# EAGLE board M_3x4._v9 (EAGLE 9.6.2), part 1 of 2
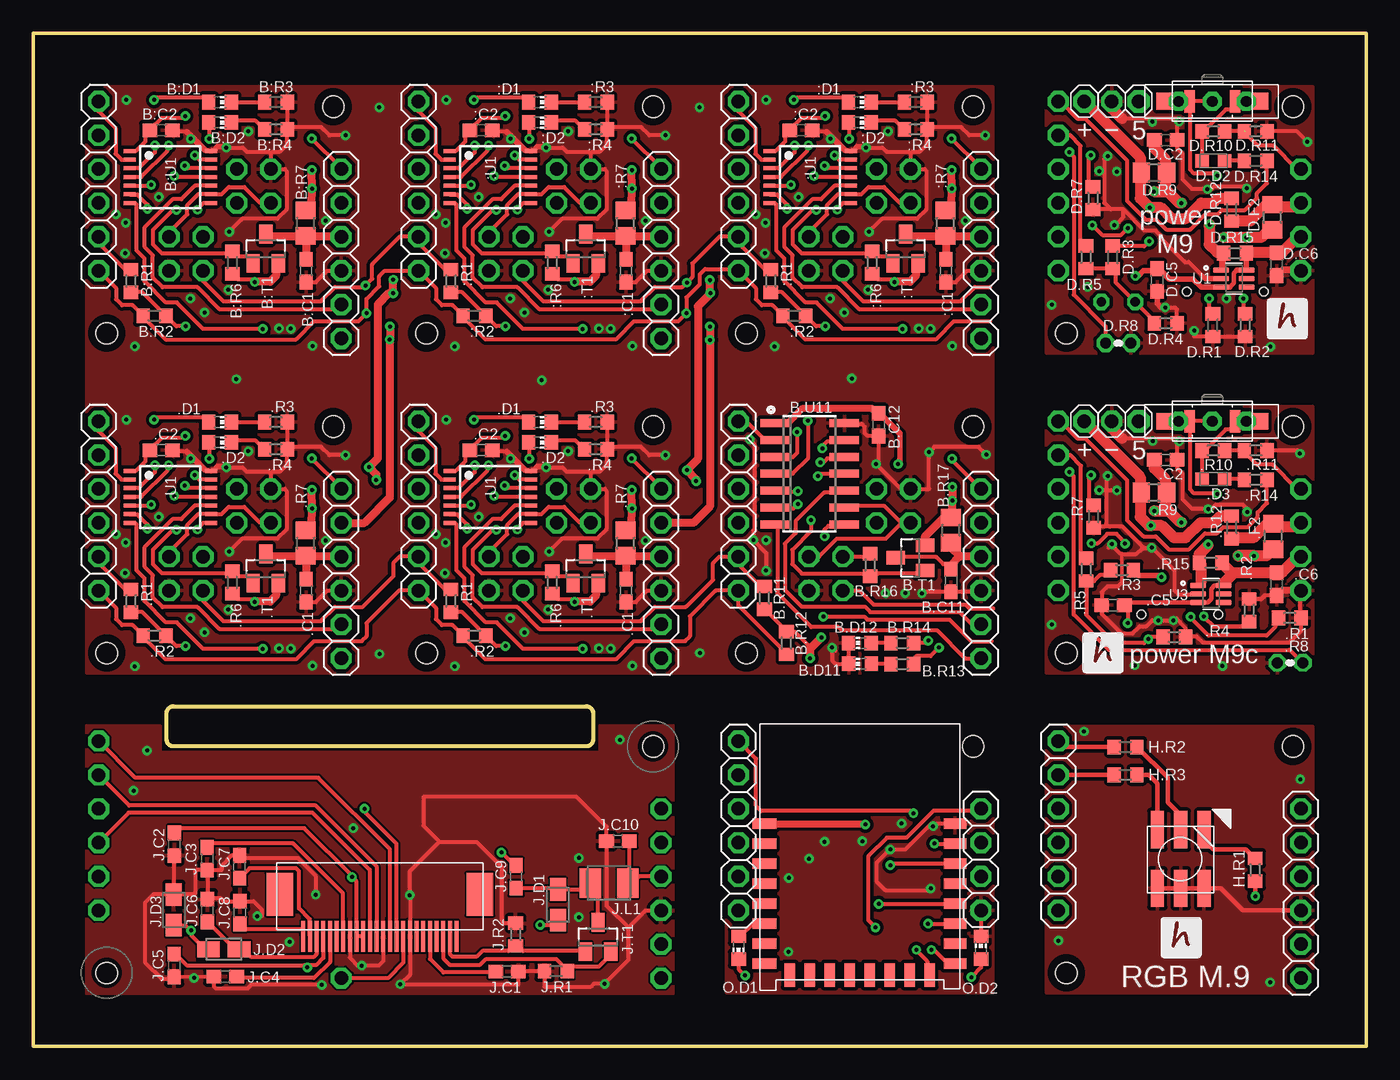
[diagram p0: board, top side]
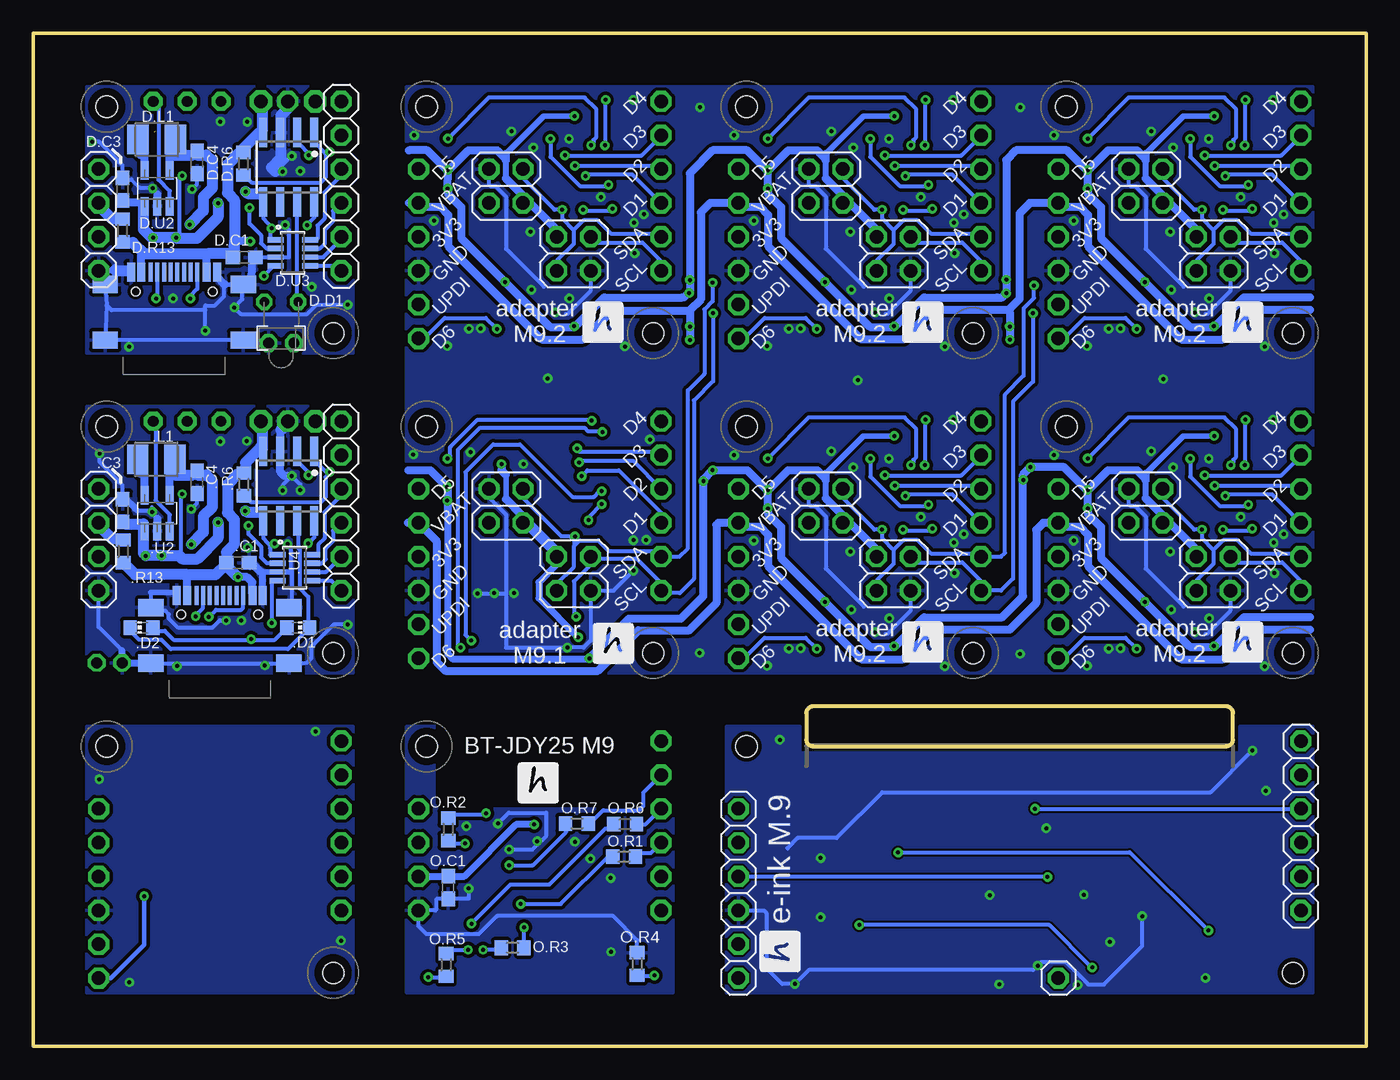
[diagram p1: board, bottom side, seen from below]

Size 100 x 76 mm. Coordinates in mm from the lower left corner, seen from the top.
Outline: 0,0 100,0 100,76 0,76 0,0
Copper layers (1*16): Top 0.035mm / dielectric 1.5mm / Bottom 0.035mm
Design rules "default *": minimum track width 10mil, minimum drill 0.3mm, track to track 6mil, track to pad 6mil, pad to pad 6mil, via to via 6mil, smd to smd 6mil, copper to edge 0mil, drill to drill 15mil, minimum pad ring 10mil, minimum via ring 8mil, stop-mask expansion 4mil, vias tented up to drill 14mil, thermal gap 10mil
Holes 1.6 mm at 5.5,29.5 22.5,46.5 29.5,29.5 46.5,46.5 53.5,29.5 70.5,46.5 5.5,53.5 22.5,70.5 29.5,53.5 46.5,70.5 53.5,53.5 70.5,70.5 5.5,5.5 46.5,22.5 70.5,22.5 77.5,5.5 94.5,22.5 77.5,29.5 94.5,46.5 77.5,53.5 94.5,70.5
tRestrict: area 21.5,45.5 to 23.5,47.5; area 4.5,28.5 to 6.5,30.5; area 45.5,45.5 to 47.5,47.5; area 28.5,28.5 to 30.5,30.5; area 69.5,69.5 to 71.5,71.5; area 52.5,52.5 to 54.5,54.5; area 21.5,69.5 to 23.5,71.5; area 4.5,52.5 to 6.5,54.5; area 45.5,69.5 to 47.5,71.5; area 28.5,52.5 to 30.5,54.5; area 69.5,45.5 to 71.5,47.5; area 52.5,28.5 to 54.5,30.5; 9 more areas
bRestrict: area 21.5,45.5 to 23.5,47.5; area 4.5,28.5 to 6.5,30.5; area 45.5,45.5 to 47.5,47.5; area 28.5,28.5 to 30.5,30.5; area 69.5,69.5 to 71.5,71.5; area 52.5,52.5 to 54.5,54.5; area 21.5,69.5 to 23.5,71.5; area 4.5,52.5 to 6.5,54.5; area 45.5,69.5 to 47.5,71.5; area 28.5,52.5 to 30.5,54.5; area 69.5,45.5 to 71.5,47.5; area 52.5,28.5 to 54.5,30.5; 9 more areas
Milling: 8 lines

## Footprints (pad centres in the part's own frame; a part is rotated, then mirrored left to right if it is on the bottom)
C0603 = smd 1.1 x 1: 1 -0.85,0; 2 0.85,0
CHIP-LED0603 = smd 1.1 x 1: A1 0,-0.85; C1 0,0.85
1X06 = drill 1.016 pad 1.575 octagon: 1 -6.35,0; 2 -3.81,0; 3 -1.27,0; 4 1.27,0; 5 3.81,0; 6 6.35,0
2X02 = drill 1.016 pad 1.575 octagon: 1 -1.27,-1.27; 2 -1.27,1.27; 3 1.27,-1.27; 4 1.27,1.27
R0603 = smd 1 x 1.1: 1 -0.85,0; 2 0.85,0
FUSE = smd 1.3 x 1.5: 1 -0.95,0; 2 0.95,0
SO23 = smd 1 x 1.4: D 0,1.1; G -0.95,-1.1; S 0.95,-1.1
SO14 = smd 0.6 x 2.2: 1 -3.81,-2.6; 2 -2.54,-2.6; 3 -1.27,-2.6; 4 0,-2.6; 5 1.27,-2.6; 6 2.54,-2.6; 7 3.81,-2.6; 8 3.81,2.6; 9 2.54,2.6; 10 1.27,2.6; 11 0,2.6; 12 -1.27,2.6; 13 -2.54,2.6; 14 -3.81,2.6
TSSOP14 = smd 0.3 x 0.9: 1 -1.95,-3.06; 2 -1.3,-3.06; 3 -0.65,-3.06; 4 0,-3.06; 5 0.65,-3.06; 6 1.3,-3.06; 7 1.95,-3.06; 8 1.95,3.06; 9 1.3,3.06; 10 0.65,3.06; 11 0,3.06; 12 -0.65,3.06; 13 -1.3,3.06; 14 -1.95,3.06
LED_1.8 = drill 0.7 octagon: 1 -1.27,-0.4; 2 1.27,-0.4
DIODE = smd 1 x 1: A 0.85,0; C -0.85,0
R0805 = smd 1.3 x 1.5: 1 -0.95,0; 2 0.95,0
1X04 = drill 1.016 pad 1.575 octagon: 1 -3.81,0; 2 -1.27,0; 3 1.27,0; 4 3.81,0
L3230M = smd 1.6 x 2.2: 1 -1.4,0; 2 1.4,0
1X-03-2 = drill 1.016 pad 1.676 octagon: 1 -2.016,0; 3 2.048,0 | drill 1.016 pad 1.575 octagon: 2 -0.016,0
SWITCH = drill 0.8 pad 1.422 octagon: P$1 2.54,0; P$2 0,0; P$3 -2.54,0 | smd 0.8 x 1.7: P$4 -1.7,0; P$5 1.7,0 | smd 1.27 x 1.27: P$6 -3.556,0; P$7 3.556,0
THERM = drill 0.813 octagon: 1 -0.953,0; 2 0.953,0
SOP8 = smd 0.6 x 2.2: 1 -1.905,-2.6; 2 -0.635,-2.6; 3 0.635,-2.6; 4 1.905,-2.6; 5 1.905,2.6; 6 0.635,2.6; 7 -0.635,2.6; 8 -1.905,2.6
SOT32-5 = smd 0.6 x 1.4: BP 0.95,1.35; GND 0,-1.35; SHDN 0.95,-1.35; VIN -0.95,-1.35; VOUT -0.95,1.35
SOT23-8 = smd 0.4 x 1.2: 1 -0.975,-1.3; 2 -0.325,-1.3; 3 0.325,-1.3; 4 0.975,-1.3; 5 0.975,1.3; 6 0.325,1.3; 7 -0.325,1.3; 8 -0.975,1.3
RGB_WW-FCE50TC-Q1 = smd 1 x 2.8: 1 -1.778,-2.286; 2 -0.028,-2.286; 3 1.722,-2.286; 4 -1.778,2.114; 5 -0.028,2.114; 6 1.722,2.114
SHOTKY_2.8 = smd 1.7 x 1.2: A -1.15,0; K 1.15,0
1X01 = drill 1.016 pad 1.575 octagon: 1 0,0
E-INK-24 = smd 0.3 x 2.3: P$1 -5.75,3.25; P$2 -5.25,3.25; P$3 -4.75,3.25; P$4 -4.25,3.25; P$5 -3.75,3.25; P$6 -3.25,3.25; P$7 -2.75,3.25; P$8 -2.25,3.25; P$9 -1.75,3.25; P$10 -1.25,3.25; P$11 -0.75,3.25; P$12 -0.25,3.25; P$13 0.25,3.25; P$14 0.75,3.25; P$15 1.25,3.25; P$16 1.75,3.25; P$17 2.25,3.25; P$18 2.75,3.25; P$19 3.25,3.25; P$20 3.75,3.25; P$21 4.25,3.25; P$22 4.75,3.25; P$23 5.25,3.25; P$24 5.75,3.25 | smd 2 x 3.2: P$25 -7.5,0.1; P$26 7.5,0.1
SOT65P210X110-6N = smd 1.19 x 0.4: 1 -0.96,0.65; 2 -0.96,0; 3 -0.96,-0.65; 4 0.96,-0.65; 5 0.96,0; 6 0.96,0.65
USB-C = smd 0.6 x 1.45: A1B12 -3.235,3.825; A4B9 -2.46,3.825; B1A12 3.215,3.825; B4A9 2.44,3.825 | smd 0.3 x 1.45: A5 -1.26,3.825; A6 -0.26,3.825; A7 0.24,3.825; A8 1.24,3.825; B5 1.74,3.825; B6 0.74,3.825; B7 -0.76,3.825; B8 -1.76,3.825 | smd 1.9 x 1.3: SH1 -5.18,2.91; SH2 -5.18,-1.27; SH3 5.18,-1.27; SH4 5.18,2.91 | hole 0.65: 2.88,2.38; -2.9,2.38
JDY-25 = smd 1.676 x 0.813: ALED 14.651,2; GND 14.651,12.5; OUT3 14.651,3.5; OUT4 14.651,8; PWRC 14.651,9.5; RST 14.651,11; RXD 14.651,6.5; TXD 14.651,5 | smd 1.778 x 0.813: INPUT1 0.349,2; INPUT3 0.349,3.5; INPUT5 0.349,6.5; NC1 0.349,11; NC2 0.349,9.5; NC3 0.349,8; STAT 0.349,5; VCC 0.349,12.5 | smd 0.813 x 1.778: INPUT2 3.75,1.149; INPUT4 6.75,1.149; NC4 2.25,1.149; NC5 9.75,1.149; NC6 11.25,1.149; OUT1 12.75,1.149; OUT2 5.25,1.149; OUT5 8.25,1.149

## Placement (x,y rotation side)
B.C11  100n  [C0603]  68.85,34.94 270 top
B.C12  100n  [C0603]  63.41,46.63 270 top
B.D11  RED  [CHIP-LED0603]  62.03,28.69 90 top
B.D12  GREEN  [CHIP-LED0603]  62,30.24 90 top
B.J1  [1X06]  28.9,40.54 90 top
B.J2  [1X06]  4.9,40.54 90 top
B.J3  [2X02]  11.46,35.46 270 bottom
B.J4  [2X02]  16.54,40.54 270 bottom
B.J5  [1X06]  23.1,35.46 270 top
B.J6  [2X02]  35.46,35.46 270 bottom
B.J7  [2X02]  40.54,40.54 270 bottom
B.J8  [1X06]  47.1,35.46 270 top
B.J9  [1X06]  52.9,64.54 90 top
B.J10  [2X02]  59.46,59.46 270 bottom
B.J11  [2X02]  64.54,64.54 270 bottom
B.J12  [1X06]  71.1,59.46 270 top
B.J13  [1X06]  4.9,64.54 90 top
B.J14  [2X02]  11.46,59.46 270 bottom
B.J15  [2X02]  16.54,64.54 270 bottom
B.J16  [1X06]  23.1,59.46 270 top
B.J17  [1X06]  28.9,64.54 90 top
B.J18  [2X02]  35.46,59.46 270 bottom
B.J19  [2X02]  40.54,64.54 270 bottom
B.J20  [1X06]  47.1,59.46 270 top
B.J21  [1X06]  52.9,40.54 90 top
B.J22  [2X02]  59.46,35.46 270 bottom
B.J23  [2X02]  64.54,40.54 270 bottom
B.J24  [1X06]  71.1,35.46 270 top
B.R11  2k2  [R0603]  54.85,33.65 270 top
B.R12  2k2  [R0603]  56.5,30.24 90 top
B.R13  330  [R0603]  65.2,28.66 0 top
B.R14  2k2  [R0603]  65.19,30.24 0 top
B.R16  100k  [R0603]  62.78,36.11 90 top
B.R17  alt fuse or 0R  [FUSE]  68.85,38.72 90 top
B.T1  FDV304  [SO23]  65.8,36.64 90 top
B.U11  AT414  [SO14]  58.24,42.95 270 top
B:C1  100n  [C0603]  20.47,58.18 270 top
B:C2  100n  [C0603]  9.6,68.72 0 top
B:D1  RED  [CHIP-LED0603]  14,70.83 270 top
B:D2  GREEN  [CHIP-LED0603]  14,69.31 270 top
B:R1  2k2  [R0603]  7.34,57.42 270 top
B:R2  2k2  [R0603]  9.09,54.8 0 top
B:R3  330  [R0603]  18.2,70.83 180 top
B:R4  2k2  [R0603]  18.2,68.8 180 top
B:R6  100k  [R0603]  14.93,58.79 270 top
B:R7  alt fuse or 0R  [FUSE]  20.44,61.75 90 top
B:T1  FDV304  [SO23]  17.44,59.83 0 top
B:U1  ATTINY3224-XU  [TSSOP14]  10.28,65.22 270 top
D.C1  4u7  [C0603]  84.18,59.18 180 bottom
D.C2  4u7  [C0603]  84.95,67.99 180 top
D.C3  4u7  [C0603]  93.31,64.3 270 bottom
D.C4  10u  [C0603]  87.71,66.32 90 bottom
D.C5  100n  [C0603]  84.31,57.49 90 top
D.C6  100n  [C0603]  93.28,58.66 90 top
D.D1  LED_1.8  [LED_1.8]  81.4,55.45 180 bottom
D.D2  DIODE  [DIODE]  88.53,66.44 0 top
D.F2  1.1A  [R0805]  92.97,62.2 90 top
D.J2  [1X06]  76.9,64.54 90 bottom
D.J3  [1X04]  95.1,62 270 bottom
D.L1  2u2  [L3230M]  90.74,68.04 0 bottom
D.LIPOL  PINHEAD-1X3-2  [1X-03-2]  80.9,70.89 180 top
D.ON/OFF/RESET  SWITCH  [SWITCH]  88.46,70.89 0 top
D.R1  5k1  [R0603]  88.49,54.1 270 top
D.R2  5k1  [R0603]  90.92,54.1 270 top
D.R3  3k3  [R0603]  80.98,59.19 90 top
D.R4  5k1  [R0603]  84.95,54.24 180 top
D.R5  10k  [R0603]  78.97,59.2 90 top
D.R6  10k  [R0603]  84.24,66.21 90 bottom
D.R7  I=1800/R  [R0603]  79.5,63.62 90 top
D.R8  TERM_10K  [THERM]  81.4,52.75 180 top
D.R9  0.1R  [R0805]  84.08,65.53 180 top
D.R10  150k  [R0603]  88.53,68.64 0 top
D.R11  330k  [R0603]  91.71,68.64 0 top
D.R12  0  [R0603]  89.9,62.75 270 top
D.R13  0  [R0603]  93.31,61.2 90 bottom
D.R14  680k  [R0603]  91.71,66.44 180 top
D.R15  0R  [R0603]  90.16,59.5 180 top
D.U1  CN3083  [SOP8]  80.83,65.95 180 bottom
D.U2  LM3671_3.3  [SOT32-5]  90.7,64.37 0 bottom
D.U3  [SOT23-8]  80.53,59.53 270 bottom
G.J1  [1X06]  52.9,16.54 90 top
G.J2  [1X04]  71.1,14 270 top
H.D1  RGB_WW-FCE50TC-Q1  [RGB_WW-FCE50TC-Q1]  86.05,13.95 180 top
H.J1  [1X06]  95.1,11.46 270 top
H.J2  [1X06]  76.9,16.54 90 top
H.R1  82  [R0603]  91.67,13.24 90 top
H.R2  82  [R0603]  81.94,22.45 0 top
H.R3  82  [R0603]  81.94,20.36 0 top
J.C1  4u7  [C0603]  35.54,5.61 0 top
J.C2  1u  [C0603]  10.59,15.16 270 top
J.C3  1u  [C0603]  13.05,14.07 270 top
J.C4  4u7  [C0603]  14.4,5.23 180 top
J.C5  4u7  [C0603]  10.57,6.05 270 top
J.C6  4u7  [C0603]  13.07,10.19 90 top
J.C7  4u7  [C0603]  15.48,13.46 90 top
J.C8  1u  [C0603]  15.51,10.03 90 top
J.C9  4u7  [C0603]  36.22,12.72 90 top
J.C10  4u7  [C0603]  43.86,15.39 180 top
J.D1  SHOTKY_2.8  [SHOTKY_2.8]  39.36,10.62 270 top
J.D2  SHOTKY_2.8  [SHOTKY_2.8]  14.3,7.28 180 top
J.D3  SHOTKY_2.8  [SHOTKY_2.8]  10.54,10.23 90 top
J.J1  [1X06]  4.9,16.54 90 bottom
J.J2  [1X01]  23.1,5.11 0 bottom
J.J3  [1X06]  47.1,11.46 270 bottom
J.J4  E-INK-24  [E-INK-24]  26,11.5 180 top
J.L1  10uH/1A  [L3230M]  43.2,12.25 180 top
J.R1  82  [R0603]  39.21,5.64 180 top
J.R2  100k  [R0603]  36.19,8.38 270 top
J.T1  NX3008  [SO23]  42.37,8.19 0 top
O.C1  100n  [C0603]  68.87,11.91 90 bottom
O.D1  [CHIP-LED0603]  52.92,7.4 180 top
O.D2  [CHIP-LED0603]  71.1,7.4 0 top
O.R1  2k2  [R0603]  55.67,14.22 0 bottom
O.R2  2k2  [R0603]  68.87,16.27 270 bottom
O.R3  2k2  [R0603]  64.05,7.39 0 bottom
O.R4  2k2  [R0603]  54.7,6.17 270 bottom
O.R5  2k2  [R0603]  69.03,6.09 90 bottom
O.R6  2k2  [R0603]  55.6,16.66 0 bottom
O.R7  2k2  [R0603]  59.22,16.71 0 bottom
U1  LM66100DCKR  [SOT65P210X110-6N]  90.08,57.6 0 top
U$1  USB-C  [USB-C]  89.43,54.25 0 bottom
U$2  JDY-25  [JDY-25]  54.5,4.2 0 top
Ḃ.C1  100n  [C0603]  20.47,34.18 270 top
Ḃ.C2  100n  [C0603]  9.6,44.72 0 top
Ḃ.D1  RED  [CHIP-LED0603]  14,46.83 270 top
Ḃ.D2  GREEN  [CHIP-LED0603]  14,45.31 270 top
Ḃ.R1  2k2  [R0603]  7.34,33.42 270 top
Ḃ.R2  2k2  [R0603]  9.09,30.8 0 top
Ḃ.R3  330  [R0603]  18.2,46.83 180 top
Ḃ.R4  2k2  [R0603]  18.2,44.8 180 top
Ḃ.R6  100k  [R0603]  14.93,34.79 270 top
Ḃ.R7  alt fuse or 0R  [FUSE]  20.44,37.75 90 top
Ḃ.T1  FDV304  [SO23]  17.44,35.83 0 top
Ḃ.U1  ATTINY3224-XU  [TSSOP14]  10.28,41.22 270 top
Ḅ.C1  100n  [C0603]  44.47,34.18 270 top
Ḅ.C2  100n  [C0603]  33.6,44.72 0 top
Ḅ.D1  RED  [CHIP-LED0603]  38,46.83 270 top
Ḅ.D2  GREEN  [CHIP-LED0603]  38,45.31 270 top
Ḅ.R1  2k2  [R0603]  31.34,33.42 270 top
Ḅ.R2  2k2  [R0603]  33.09,30.8 0 top
Ḅ.R3  330  [R0603]  42.2,46.83 180 top
Ḅ.R4  2k2  [R0603]  42.2,44.8 180 top
Ḅ.R6  100k  [R0603]  38.93,34.79 270 top
Ḅ.R7  alt fuse or 0R  [FUSE]  44.44,37.75 90 top
Ḅ.T1  FDV304  [SO23]  41.44,35.83 0 top
Ḅ.U1  ATTINY3224-XU  [TSSOP14]  34.28,41.22 270 top
Ḅ:C1  100n  [C0603]  44.47,58.18 270 top
Ḅ:C2  100n  [C0603]  33.6,68.72 0 top
Ḅ:D1  RED  [CHIP-LED0603]  38,70.83 270 top
Ḅ:D2  GREEN  [CHIP-LED0603]  38,69.31 270 top
Ḅ:R1  2k2  [R0603]  31.34,57.42 270 top
Ḅ:R2  2k2  [R0603]  33.09,54.8 0 top
Ḅ:R3  330  [R0603]  42.2,70.83 180 top
Ḅ:R4  2k2  [R0603]  42.2,68.8 180 top
Ḅ:R6  100k  [R0603]  38.93,58.79 270 top
Ḅ:R7  alt fuse or 0R  [FUSE]  44.44,61.75 90 top
Ḅ:T1  FDV304  [SO23]  41.44,59.83 0 top
Ḅ:U1  ATTINY3224-XU  [TSSOP14]  34.28,65.22 270 top
Ḇ:C1  100n  [C0603]  68.47,58.18 270 top
Ḇ:C2  100n  [C0603]  57.6,68.72 0 top
Ḇ:D1  RED  [CHIP-LED0603]  62,70.83 270 top
Ḇ:D2  GREEN  [CHIP-LED0603]  62,69.31 270 top
Ḇ:R1  2k2  [R0603]  55.34,57.42 270 top
Ḇ:R2  2k2  [R0603]  57.09,54.8 0 top
Ḇ:R3  330  [R0603]  66.2,70.83 180 top
Ḇ:R4  2k2  [R0603]  66.2,68.8 180 top
Ḇ:R6  100k  [R0603]  62.93,58.79 270 top
Ḇ:R7  alt fuse or 0R  [FUSE]  68.44,61.75 90 top
Ḇ:T1  FDV304  [SO23]  65.44,59.83 0 top
Ḇ:U1  ATTINY3224-XU  [TSSOP14]  58.28,65.22 270 top
Ḋ.BTN  SWITCH  [SWITCH]  88.46,46.89 0 top
Ḋ.C1  4u7  [C0603]  84.66,36.27 180 bottom
Ḋ.C2  4u7  [C0603]  84.95,43.99 180 top
Ḋ.C3  4u7  [C0603]  93.31,40.2 270 bottom
Ḋ.C4  10u  [C0603]  87.71,42.32 90 bottom
Ḋ.C5  100n  [C0603]  81.01,33.09 0 top
Ḋ.C6  100n  [C0603]  93.28,34.66 90 top
Ḋ.D1  [CHIP-LED0603]  80.12,31.41 270 bottom
Ḋ.D2  [CHIP-LED0603]  91.88,31.41 90 bottom
Ḋ.D3  DIODE  [DIODE]  88.53,42.56 0 top
Ḋ.F2  1.1A  [R0805]  93.02,38.25 90 top
Ḋ.J1  USB-C  [USB-C]  86,30 0 bottom
Ḋ.J2  [1X06]  76.9,40.54 90 bottom
Ḋ.J3  [1X04]  95.1,38 270 bottom
Ḋ.L1  2u2  [L3230M]  90.77,44.04 0 bottom
Ḋ.LIPOL  PINHEAD-1X3-2  [1X-03-2]  80.9,46.89 180 top
Ḋ.R1  5k1  [R0603]  94.27,32.13 0 top
Ḋ.R2  5k1  [R0603]  91.22,32.71 90 top
Ḋ.R3  3k3  [R0603]  81.68,35.72 0 top
Ḋ.R4  5k1  [R0603]  85.61,30.7 180 top
Ḋ.R5  10k  [R0603]  79,35.76 90 top
Ḋ.R6  10k  [R0603]  84.21,42.16 90 bottom
Ḋ.R7  I=1800/R  [R0603]  79.55,39.75 90 top
Ḋ.R8  TERM_10K  [THERM]  94.29,28.76 0 top
Ḋ.R9  0.1R  [R0805]  84.08,41.53 180 top
Ḋ.R10  100k  [R0603]  88.53,44.7 0 top
Ḋ.R11  100k  [R0603]  91.71,44.7 0 top
Ḋ.R12  0  [R0603]  89.9,38.93 270 top
Ḋ.R13  0  [R0603]  93.25,37.13 90 bottom
Ḋ.R14  10k  [R0603]  91.71,42.51 180 top
Ḋ.R15  0R  [R0603]  88.33,36.26 180 top
Ḋ.U1  CN3083  [SOP8]  80.83,42.03 180 bottom
Ḋ.U2  LM3671_3.3  [SOT32-5]  90.7,39.99 0 bottom
Ḋ.U3  LM66100DCKR  [SOT65P210X110-6N]  88.35,33.93 0 top
Ḋ.U4  [SOT23-8]  80.38,35.91 270 bottom

## Library data of the parts
B.C11 B.C12 B:C1 B:C2 D.C1-D.C6 J.C1-J.C10 O.C1 Ḃ.C1 Ḃ.C2 Ḅ.C1 Ḅ.C2 Ḅ:C1 Ḅ:C2 Ḇ:C1 Ḇ:C2 Ḋ.C1-Ḋ.C6 = rcl; SPICEPREFIX: C
B.D11 B.D12 B:D1 B:D2 O.D1 O.D2 Ḃ.D1 Ḃ.D2 Ḅ.D1 Ḅ.D2 Ḅ:D1 Ḅ:D2 Ḇ:D1 Ḇ:D2 Ḋ.D1 Ḋ.D2 = led
B.J1-B.J24 D.J2 D.J3 D.LIPOL G.J1 G.J2 H.J1 H.J2 J.J1-J.J3 Ḋ.J2 Ḋ.J3 Ḋ.LIPOL = pinhead2
B.R11-B.R14 B.R16 B:R1-B:R4 B:R6 D.F2 D.R1-D.R7 D.R9-D.R15 J.R2 O.R1-O.R7 Ḃ.R1-Ḃ.R4 Ḃ.R6 Ḅ.R1-Ḅ.R4 Ḅ.R6 Ḅ:R1-Ḅ:R4 Ḅ:R6 Ḇ:R1-Ḇ:R4 Ḇ:R6 Ḋ.F2 Ḋ.R1-Ḋ.R7 Ḋ.R9-Ḋ.R15 = rcl; SPICEPREFIX: R
B.R17 B.T1 B:R7 B:T1 D.D1 D.D2 D.ON/OFF/RESET D.R8 D.U1 D.U3 H.D1 J.D1-J.D3 J.J4 J.T1 U$1 U$2 Ḃ.R7 Ḃ.T1 Ḅ.R7 Ḅ.T1 Ḅ:R7 Ḅ:T1 Ḇ:R7 Ḇ:T1 Ḋ.BTN Ḋ.D3 Ḋ.J1 Ḋ.R8 Ḋ.U1 Ḋ.U4 = hugo
B.U11 = atmel
B:U1 Ḃ.U1 Ḅ.U1 Ḅ:U1 Ḇ:U1 = ATTINY412-SSN
D.L1 J.L1 Ḋ.L1 = rcl; SPICEPREFIX: L
D.U2 Ḋ.U2 = !stavebnice03
H.R1-H.R3 J.R1 = resistor
U1 Ḋ.U3 = LM66100DCKR; AVAILABILITY: In Stock; CHECK_PRICES: https://www.snapeda.com/parts/LM66100DCKR/Texas+Instruments/view-part/?ref=eda; DESCRIPTION: 1.5-V to 5.5-V, 1.5-A, 0.5-µA IQ ideal diode with integrated FET; MF: Texas Instruments; MP: LM66100DCKR; PACKAGE: SOT-SC70-6 Texas Instruments; PRICE: None; SNAPEDA_LINK: https://www.snapeda.com/parts/LM66100DCKR/Texas+Instruments/view-part/?ref=snap

## Nets
5V: Ḋ.C1.2 Ḋ.J1.A4B9 Ḋ.J1.B4A9 Ḋ.LIPOL.1 Ḋ.R3.2 Ḋ.R6.2 Ḋ.R13.1 Ḋ.U1.4
5V1: D.C1.2 D.LIPOL.1 D.R3.2 D.R6.2 D.R13.1 D.U1.4 U$1.A4B9 U$1.B4A9
BUSY: J.J2.1 J.J4.P$9
CHRG: Ḋ.D1.A1 Ḋ.D2.A1 Ḋ.R3.1 Ḋ.R4.2 Ḋ.R5.1
CHRG1: D.D1.2 D.R3.1 D.R4.2 D.R5.1
D/C: J.J1.6 J.J4.P$11
GND: J.C1.2 J.C2.2 J.C3.2 J.C4.2 J.C5.2 J.C6.2 J.C7.2 J.C8.2 J.C10.2 J.D3.K J.J3.4 J.J4.P$8 J.J4.P$12 J.J4.P$17 J.R1.2 J.R2.1
GND1: Ḋ.C1.1 Ḋ.C2.1 Ḋ.C3.1 Ḋ.C4.1 Ḋ.C5.1 Ḋ.C6.1 Ḋ.J1.A1B12 Ḋ.J1.B1A12 Ḋ.J1.SH1 Ḋ.J1.SH2 Ḋ.J1.SH3 Ḋ.J1.SH4 Ḋ.J3.4 Ḋ.LIPOL.2 Ḋ.R1.2 Ḋ.R2.2 Ḋ.R4.1 Ḋ.R7.1 Ḋ.R8.1 Ḋ.R11.2 Ḋ.U1.3 Ḋ.U2.GND Ḋ.U3.2 Ḋ.U4.3
GND2: D.C1.1 D.C2.1 D.C3.1 D.C4.1 D.C5.1 D.C6.1 D.J3.4 D.LIPOL.2 D.R1.2 D.R2.2 D.R4.1 D.R7.1 D.R8.1 D.R11.2 D.U1.3 D.U2.GND D.U3.3 U1.2 U$1.A1B12 U$1.B1A12 U$1.SH1 U$1.SH2 U$1.SH3 U$1.SH4
GND3: B.C11.2 B.C12.2 B.D11.C1 B.D12.C1 B.J3.4 B.J4.1 B.J5.4 B.J6.4 B.J7.1 B.J8.4 B.J10.4 B.J11.1 B.J12.4 B.J14.4 B.J15.1 B.J16.4 B.J18.4 B.J19.1 B.J20.4 B.J22.4 B.J23.1 B.J24.4 B.U11.14 B:C1.2 B:C2.2 B:R3.1 B:R4.1 B:U1.14 Ḃ.C1.2 Ḃ.C2.2 Ḃ.R3.1 Ḃ.R4.1 Ḃ.U1.14 Ḅ.C1.2 Ḅ.C2.2 Ḅ.R3.1 Ḅ.R4.1 Ḅ.U1.14 Ḅ:C1.2 Ḅ:C2.2 Ḅ:R3.1 Ḅ:R4.1 Ḅ:U1.14 Ḇ:C1.2 Ḇ:C2.2 Ḇ:R3.1 Ḇ:R4.1 Ḇ:U1.14
GND4: G.J2.4 O.C1.1 O.D2.C1 O.R4.1 U$2.GND
GND5: H.D1.4 H.D1.5 H.D1.6 H.J1.4
IN+: Ḋ.BTN.P$2 Ḋ.BTN.P$3 Ḋ.BTN.P$4 Ḋ.BTN.P$6 Ḋ.C2.2 Ḋ.C3.2 Ḋ.F2.1 Ḋ.R9.1 Ḋ.U1.5 Ḋ.U1.8 Ḋ.U2.VIN Ḋ.U4.1
IN+1: D.C2.2 D.C3.2 D.F2.1 D.ON/OFF/RESET.P$2 D.ON/OFF/RESET.P$3 D.ON/OFF/RESET.P$4 D.ON/OFF/RESET.P$6 D.R9.1 D.U1.5 D.U1.8 D.U2.VIN D.U3.1
IN-: Ḋ.LIPOL.3 Ḋ.R9.2 Ḋ.R12.1 Ḋ.U4.2
IN-1: D.LIPOL.3 D.R9.2 D.R12.1 D.U3.2
N$1: Ḃ.D2.C1 Ḃ.R4.2
N$2: Ḃ.D1.C1 Ḃ.R3.2
N$3: B.J5.3 Ḃ.C1.1 Ḃ.R7.1 Ḃ.T1.D
N$4: Ḅ.D1.A1 Ḅ.U1.3
N$5: Ḃ.D1.A1 Ḃ.U1.3
N$6: Ḅ.D2.C1 Ḅ.R4.2
N$7: Ḅ.D1.C1 Ḅ.R3.2
N$8: B.J8.3 Ḅ.C1.1 Ḅ.R7.1 Ḅ.T1.D
N$9: Ḇ:D1.A1 Ḇ:U1.3
N$10: Ḇ:D2.C1 Ḇ:R4.2
N$11: Ḇ:D1.C1 Ḇ:R3.2
N$12: B.J12.3 Ḇ:C1.1 Ḇ:R7.1 Ḇ:T1.D
N$13: B:D1.A1 B:U1.3
N$14: B:D2.C1 B:R4.2
N$15: B:D1.C1 B:R3.2
N$16: B.J16.3 B:C1.1 B:R7.1 B:T1.D
N$17: Ḅ:D1.A1 Ḅ:U1.3
N$18: Ḅ:D2.C1 Ḅ:R4.2
N$19: Ḅ:D1.C1 Ḅ:R3.2
N$20: B.J20.3 Ḅ:C1.1 Ḅ:R7.1 Ḅ:T1.D
N$21: B.C11.1 B.J24.3 B.R17.1 B.T1.D
N$22: B.D12.A1 B.R14.1
N$24: B.R13.2 B.U11.3
N$25: Ḋ.L1.1 Ḋ.U2.VOUT
N$27: Ḋ.J1.B5 Ḋ.R1.1
N$28: Ḋ.J1.A5 Ḋ.R2.1
N$29: Ḋ.R7.2 Ḋ.U1.2
N$30: Ḋ.D1.C1 Ḋ.D2.C1 Ḋ.U1.7
N$31: Ḋ.R6.1 Ḋ.R8.2 Ḋ.U1.1
N$32: Ḋ.BTN.P$1 Ḋ.BTN.P$5 Ḋ.BTN.P$7 Ḋ.D3.C Ḋ.R10.1 Ḋ.U2.SHDN
N$33: Ḋ.D3.A Ḋ.R14.2
N$34: D.L1.1 D.U2.VOUT
N$35: D.R1.1 U$1.B5
N$36: D.R2.1 U$1.A5
N$37: D.R7.2 D.U1.2
N$38: D.D1.1 D.U1.7
N$39: D.R6.1 D.R8.2 D.U1.1
N$40: D.D2.C D.ON/OFF/RESET.P$1 D.ON/OFF/RESET.P$5 D.ON/OFF/RESET.P$7 D.R10.1 D.U2.SHDN
N$41: D.D2.A D.R14.2
N$42: J.C1.1 J.J4.P$5
N$43: J.C8.1 J.J4.P$24
N$44: J.C6.1 J.D2.A J.J4.P$22
N$45: J.C3.1 J.J4.P$18
N$46: J.C4.1 J.J4.P$20
N$47: J.C2.1 J.C10.1 J.J3.3 J.J4.P$15 J.J4.P$16 J.L1.1
N$48: J.C7.1 J.J4.P$23
N$49: J.C9.1 J.D1.A J.L1.2 J.T1.D
N$50: J.C5.1 J.D1.K J.J4.P$21
N$51: J.J4.P$3 J.R1.1 J.T1.S
N$52: J.J4.P$2 J.R2.2 J.T1.G
N$53: J.C9.2 J.D2.K J.D3.A
N$54: G.J2.1 O.R3.2
N$55: O.R1.1 U$2.RXD
N$56: O.R6.1 U$2.TXD
N$57: G.J1.5 O.R7.2
N$58: O.R7.1 U$2.PWRC
N$59: O.D2.A1 O.R5.1
N$60: O.R5.2 U$2.ALED
N$61: O.D1.A1 U$2.STAT
N$62: O.D1.C1 O.R4.2
N$63: O.R2.2 U$2.RST
N$64: G.J1.6 O.R2.1
N$65: O.R3.1 U$2.OUT1
N$66: H.D1.2 H.R2.2
N$67: H.D1.1 H.R1.2
N$68: H.D1.3 H.R3.2
N$69: H.J1.6 H.R1.1
N$70: H.J2.6 H.R2.1
N$71: H.J2.5 H.R3.1
PA1: B.J2.3 Ḃ.U1.11
PA2: B.J2.4 Ḃ.U1.12
PA3: B.J2.5 Ḃ.U1.13
PA4: B.J2.6 Ḃ.U1.2
PA5: B.J1.5 Ḅ.U1.13
PA6: B.J5.1 Ḃ.U1.4
PA7: Ḃ.D2.A1 Ḃ.U1.5
PA8: B.J1.4 Ḅ.U1.12
PA9: B.J1.6 Ḅ.U1.2
PA10: B.J1.3 Ḅ.U1.11
PA11: Ḅ.D2.A1 Ḅ.U1.5
PA12: B.J8.1 Ḅ.U1.4
PA13: B.J9.5 Ḇ:U1.13
PA14: B.J9.4 Ḇ:U1.12
PA15: B.J9.6 Ḇ:U1.2
PA16: B.J9.3 Ḇ:U1.11
PA17: Ḇ:D2.A1 Ḇ:U1.5
PA18: B.J12.1 Ḇ:U1.4
PA19: B.J13.5 B:U1.13
PA20: B.J13.4 B:U1.12
PA21: B.J13.6 B:U1.2
PA22: B.J13.3 B:U1.11
PA23: B:D2.A1 B:U1.5
PA24: B.J16.1 B:U1.4
PA25: B.J17.5 Ḅ:U1.13
PA26: B.J17.4 Ḅ:U1.12
PA27: B.J17.6 Ḅ:U1.2
PA28: B.J17.3 Ḅ:U1.11
PA29: Ḅ:D2.A1 Ḅ:U1.5
PA30: B.J20.1 Ḅ:U1.4
PA31: B.J21.5 B.U11.13
PA32: B.J21.4 B.U11.12
PA33: B.J21.6 B.U11.2
PA34: B.J21.3 B.U11.11
PA35: B.R14.2 B.U11.5
PA36: B.J24.1 B.U11.4
PA37: Ḋ.J2.4 Ḋ.U4.8
PA38: Ḋ.J2.3 Ḋ.U4.7
PA39: Ḋ.J2.5 Ḋ.R5.2
PA40: Ḋ.J2.6 Ḋ.R14.1
PA41: D.J2.4 D.U3.8
PA42: D.J2.3 D.U3.7
PA43: D.J2.5 D.R5.2
PA44: D.J2.6 D.R14.1
PA51: B.D11.A1 B.R13.1
PB1: Ḅ.R6.1 Ḅ.T1.G Ḅ.U1.6
PB2: B.J5.6 Ḃ.U1.7
PB3: Ḃ.R6.1 Ḃ.T1.G Ḃ.U1.6
PB4: B.J8.6 Ḅ.U1.7
PB5: Ḇ:R6.1 Ḇ:T1.G Ḇ:U1.6
PB6: B.J12.6 Ḇ:U1.7
PB7: B:R6.1 B:T1.G B:U1.6
PB8: B.J16.6 B:U1.7
PB9: Ḅ:R6.1 Ḅ:T1.G Ḅ:U1.6
PB10: B.J20.6 Ḅ:U1.7
PB11: B.R16.1 B.T1.G B.U11.6
PB12: B.J24.6 B.U11.7
PB13: Ḋ.J3.1 Ḋ.R10.2 Ḋ.R11.1
PB14: D.J3.1 D.R10.2 D.R11.1
RES: J.J1.4 J.J4.P$10
RX: G.J1.4 O.R6.2
SCL: B.J1.1 B.J2.1 B.J3.2 B.J4.3 B.J6.2 B.J7.3 B.J9.1 B.J10.2 B.J11.3 B.J13.1 B.J14.2 B.J15.3 B.J17.1 B.J18.2 B.J19.3 B.J21.1 B.J22.2 B.J23.3 B.R12.1 B.U11.9 B:R2.1 B:U1.9 Ḃ.R2.1 Ḃ.U1.9 Ḅ.R2.1 Ḅ.U1.9 Ḅ:R2.1 Ḅ:U1.9 Ḇ:R2.1 Ḇ:U1.9
SCL1: Ḋ.J2.1 Ḋ.U4.5
SCL2: D.J2.1 D.U3.5
SCLK: J.J1.5 J.J4.P$13
SDA: B.J1.2 B.J2.2 B.J3.3 B.J4.2 B.J6.3 B.J7.2 B.J9.2 B.J10.3 B.J11.2 B.J13.2 B.J14.3 B.J15.2 B.J17.2 B.J18.3 B.J19.2 B.J21.2 B.J22.3 B.J23.2 B.R11.1 B.U11.8 B:R1.1 B:U1.8 Ḃ.R1.1 Ḃ.U1.8 Ḅ.R1.1 Ḅ.U1.8 Ḅ:R1.1 Ḅ:U1.8 Ḇ:R1.1 Ḇ:U1.8
SDA1: Ḋ.J2.2 Ḋ.U4.6
SDA2: D.J2.2 D.U3.6
SDI: J.J1.3 J.J4.P$14
TX: G.J1.3 O.R1.2
UPDI: B.J5.5 Ḃ.U1.10
UPDI1: B.J8.5 Ḅ.U1.10
UPDI2: B.J12.5 Ḇ:U1.10
UPDI3: B.J16.5 B:U1.10
UPDI4: B.J20.5 Ḅ:U1.10
UPDI5: B.J24.5 B.U11.10
VBAT: B.J5.2 B.J8.2 B.J12.2 B.J16.2 B.J20.2 B.J24.2
VCC: B.C12.1 B.J3.1 B.J4.4 B.J6.1 B.J7.4 B.J10.1 B.J11.4 B.J14.1 B.J15.4 B.J18.1 B.J19.4 B.J22.1 B.J23.4 B.R11.2 B.R12.2 B.R16.2 B.R17.2 B.T1.S B.U11.1 B:C2.1 B:R1.2 B:R2.2 B:R6.2 B:R7.2 B:T1.S B:U1.1 Ḃ.C2.1 Ḃ.R1.2 Ḃ.R2.2 Ḃ.R6.2 Ḃ.R7.2 Ḃ.T1.S Ḃ.U1.1 Ḅ.C2.1 Ḅ.R1.2 Ḅ.R2.2 Ḅ.R6.2 Ḅ.R7.2 Ḅ.T1.S Ḅ.U1.1 Ḅ:C2.1 Ḅ:R1.2 Ḅ:R2.2 Ḅ:R6.2 Ḅ:R7.2 Ḅ:T1.S Ḅ:U1.1 Ḇ:C2.1 Ḇ:R1.2 Ḇ:R2.2 Ḇ:R6.2 Ḇ:R7.2 Ḇ:T1.S Ḇ:U1.1
VCC1: Ḋ.C4.2 Ḋ.L1.2 Ḋ.R15.2 Ḋ.U2.BP Ḋ.U3.1
VCC2: Ḋ.C5.2 Ḋ.C6.2 Ḋ.J3.3 Ḋ.R15.1 Ḋ.U3.3 Ḋ.U3.6 Ḋ.U4.4
VCC3: D.C4.2 D.L1.2 D.R15.2 D.U2.BP U1.1
VCC4: D.C5.2 D.C6.2 D.J3.3 D.R15.1 D.U3.4 U1.3 U1.6
VCC5: G.J2.3 O.C1.2 U$2.VCC
VDD: H.J1.3
VOPT: Ḋ.F2.2 Ḋ.J3.2 Ḋ.R12.2 Ḋ.R13.2
VOPT1: D.F2.2 D.J3.2 D.R12.2 D.R13.2

## Tracks (layer width: path | path; a pad name or v marks a point on that pad's centre or on a via)
5V  (via drill 0.3)
  Top 0.406: Ḋ.R3.2 82.93,35.33 84.51,35.33 v84.64,35.2
  Bottom 0.305: 83.68,34.93 Ḋ.J1.B4A9
  Bottom 0.61: Ḋ.R6.2 84.72,43.01 84.65,42.94 | 82.84,44.73 Ḋ.U1.4 82.99,44.88 | Ḋ.J1.B4A9 83.57,34.12 83.57,34.81 83.96,35.2 v84.64,35.2 84.69,35.25 | Ḋ.C1.2 85.56,36.33 85.56,37.02 | Ḋ.J1.A4B9 88.46,35.38
  Bottom 0.813: Ḋ.R6.2 84.08,43.13 84.08,43.79 82.99,44.88 | 84.65,42.94 85.43,42.16 85.43,40.03 84.9,39.5 84.9,37.69 85.51,37.08 Ḋ.C1.2 | 82.84,44.73 82.84,46.38 83.17,46.71 Ḋ.LIPOL.1 | 93.23,36.3 Ḋ.R13.1 92.36,35.38 88.46,35.38 86.33,35.38 85.51,36.2 Ḋ.C1.2 | 84.69,35.25 84.7,35.25 85.49,36.04 85.49,36.25 Ḋ.C1.2
5V1  (via drill 0.3)
  Top 0.305: D.R3.2 81,60.01 83.35,60.01 v83.72,60.39
  Bottom 0.254: 91.78,59.45 91.7,59.45
  Bottom 0.61: 86.99,58.52 U$1.B4A9 86.99,59.37 86.91,59.45 | D.R6.2 84.29,67.01 84.58,67.01 | U$1.A4B9 91.89,59.34 91.78,59.45 | 82.84,68.65 D.U1.4 82.76,68.53 83.07,68.53 | v83.72,60.39 84.9,60.39 | 84.9,60.19 84.92,60.19 | 84.92,60.03 84.95,60.03
  Bottom 0.813: D.R6.2 84.24,67.36 83.07,68.53 | 84.58,67.01 85.43,66.16 85.43,64.03 84.9,63.5 84.9,60.39 84.9,60.19 | D.C1.2 85.15,59.3 85.15,59.45 | 85.15,59.45 84.96,59.45 84.95,59.47 84.95,60.03 | 85.15,59.45 86.91,59.45 91.7,59.45 92.54,60.3 93.25,60.3 D.R13.1 | 82.84,68.65 82.84,70.38 83.17,70.71 D.LIPOL.1 | 84.92,60.19 84.92,60.03
BUSY
  Top 0.305: J.J4.P$9 27.75,6.26 26.6,5.11 J.J2.1
CHRG  (via drill 0.3)
  Top 0.305: Ḋ.R4.2 83.81,30.7 v83.65,30.55 83.35,30.24 81.11,30.24 79,32.36 Ḋ.R5.1 79.58,34.91 80.02,35.34 80.45,35.34 Ḋ.R3.1
  Bottom 0.305: Ḋ.D1.A1 81.89,30.5 83.6,30.5 v83.65,30.55 83.7,30.5 89.47,30.5 90.13,31.16 90.78,31.16 Ḋ.D2.A1
CHRG1
  Top 0.305: D.R4.2 84.1,54.4 82.56,55.95 82.56,55.85 D.D1.2 81.19,57.31 81.19,58.13 D.R3.1 D.R5.1
  Bottom 0.305: D.D1.2
D/C
  Top 0.305: J.J4.P$11 26.75,14.76 21.37,20.14 7.65,20.14 J.J1.6
GND  (via drill 0.3)
  Top 0.305: J.J4.P$17 23.75,6.63 24.34,6.04 v24.65,6.04 25.92,6.04 26.27,6.4 26.25,6.4 J.J4.P$12 | 13.56,5.2 J.C4.2 | v42.86,4.67 42.81,4.72 | J.J4.P$8 | v42.86,4.67 42.86,4.69 44.64,6.47 44.64,8.9 | 10.73,5.09 10.77,5.04 9.62,5.04 8.36,6.3 8.36,10.74 8.99,11.38 J.D3.K | 10.73,5.09 10.64,5.22 J.C4.2 | J.C5.2 10.64,5.09 10.73,5.09 | J.C1.2 36.06,5.94 | v42.86,4.67 42.05,4.67 41.84,4.46 38.36,4.46 J.R1.2 38.33,5.61 J.C1.2 | J.C1.2 36.39,4.64 v27.53,4.64 28.25,5.37 J.J4.P$8 | J.R2.1 35.33,9.23 35.17,9.39 35.17,13.41 33.28,15.3 30.53,15.3 | 30.53,15.3 30.41,15.3 28.24,13.13 v28.24,11.32 v28.25,11.31 J.J4.P$8 | 30.53,15.3 29.28,16.54 29.28,18.7 40.77,18.7 43.01,16.46 J.C10.2 43.01,10.53 44.64,8.9 | J.C3.2 13.07,13.19 J.C6.2 13.16,11.12 14.04,11.12 14.28,10.88 J.C8.2 16.52,10.88 17.14,10.26 17.14,9.75 v16.8,9.75 | J.C3.2 14.11,13.22 14.11,13.53 14.9,14.31 J.C7.2 15.69,14.1 19.87,14.1 21.18,12.79 v21.18,11.37 | J.D3.K 10.54,14.26 J.C2.2 | J.D3.K 12.04,11.38 12.16,11.5 12.14,11.53 12.14,13.1 12.25,13.22 J.C3.2 | J.J3.4 45.93,10.19 44.64,8.9 | v21.64,4.59 16.34,4.59 16.06,4.31 13.71,4.31 13.55,4.47 J.C4.2
  Bottom 0.305: 43.4,14.83 43.42,14.85 42.66,15.62 39.74,15.62 36.31,19.05 11.66,19.05 v8.53,22.18 | J.J3.4 45.19,10.19 45,10 45,5.84 43.83,4.67 v42.86,4.67 41.82,5.71 24.98,5.71 v24.65,6.04 24.37,6.32 22.52,6.32 20.85,4.64 19.68,4.64 16.8,7.52 v16.8,9.75
  other vias: 44,23 7.51,19.17 19.22,7.82 12.06,5.13 24,16.35 40.94,9.67 40.94,14.12
  pour Top: 48,24 42.5,24 42.5,22 9.5,22 9.5,24 4,24 4,4 48,4
  pour Bottom: 48,24 42.5,24 42.5,22 9.5,22 9.5,24 4,24 4,4 48,4
GND1  (via drill 0.3)
  Top 0.254: 81.66,36.94 81.66,34.79
  Top 0.305: 94.98,44.52 v95.03,44.47 94.8,44.7 Ḋ.R11.2 | 84.08,45.61 85.76,45.61 85.8,45.57 Ḋ.C2.1 85.8,43.41 86.22,43 86.22,41.04 86.94,40.32 88.13,40.32 v88.15,40.3 88.01,40.16 88.23,40.16 88.71,40.64 90.73,40.64 91.07,40.3 v91.07,40.1 | 84.08,45.61 81.67,45.61 | v80.93,37.68 80.95,37.68 | Ḋ.R7.1 79.65,39.01 80.71,39.01 | 83.35,37.36 81.72,38.98 80.73,38.98 80.71,39.01 | 80.71,39.01 80.5,39.21 80.5,42.69 v80.61,42.79 | v83.98,45.41 84.08,45.51 84.08,45.61 | 92.39,33.81 Ḋ.C6.1 93.68,34.22 | v80.93,37.68 81.12,37.49 81.12,37.39 81.56,36.94 81.66,36.94 82.77,36.94 83.19,37.36 83.35,37.36 | Ḋ.U3.2 87.34,33.88 85.94,33.88 85.61,34.21 85.61,35.7 v83.91,37.41 83.86,37.36 83.35,37.36 | 80.67,37.42 v80.93,37.68 | 95.08,34.22 95.08,32.18 Ḋ.R1.2 95.12,31.17 94.23,30.28 87.75,30.28 87.27,30.75 86.51,30.75 Ḋ.R4.1 86.46,31.36 85.7,32.12 v85.53,31.95 v84.39,31.95 83.95,31.95 83.5,31.5 83.02,31.5 82.47,30.96 81.64,30.96 80.16,32.44 Ḋ.C5.1 80.16,34.07 80.58,34.48 81.36,34.48 81.66,34.79 | v79.97,41.72 81.27,41.72 v81.29,41.7
  Top 0.356: 92.39,33.81 92.14,33.56 Ḋ.R2.2
  Top 0.406: 95.08,34.22 Ḋ.J3.4
  Top 0.508: 93.68,34.22 95.08,34.22
  Top 0.61: 80.94,46.34 80.92,46.39 Ḋ.LIPOL.2
  Top 0.813: 81.67,45.61 80.94,46.34
  Bottom 0.305: 84.07,36.02 Ḋ.C1.1 83.64,36.27 | v95.03,44.47 95.03,43.83 93.56,42.36 93.56,42.32 93.31,42.07 Ḋ.C3.1 93.28,41.02 93.03,41.02 | 82.94,35.58 82.79,35.58 82.78,35.58 | 80.8,35.58 80.67,35.7 | 80.67,35.7 80.62,35.75 80.62,33.29 80.72,33.19 Ḋ.J1.SH4 | 80.67,35.7 80.67,37.34 81.01,37.68 v80.93,37.68 | Ḋ.U4.3 | 90.7,39.58 91.1,39.97 91.1,40.43 | v91.07,40.1 91.07,40.15 92.24,40.15 92.37,40.28 92.37,40.36 | v88.15,40.3 87.71,40.74 Ḋ.C4.1 | v79.97,41.72 79.97,42.16 v80.61,42.79 81.29,42.1 v81.29,41.7 | Ḋ.J1.SH2 Ḋ.J1.SH3 79.82,28.73 79.45,28.81 79.16,29.1 79.16,29.96 77.48,31.64 v76.41,31.64 | 93.17,28.73 93.2,28.76 Ḋ.R8.1 | 93.34,29.68 95.1,31.44 Ḋ.J3.4 | Ḋ.J1.A1B12 89.33,34.05 | 91.2,34.05 91.2,33.21 Ḋ.J1.SH1 90.95,32.68 90.11,32.68 89.83,32.41 89.83,32.1 89.13,31.39 86.57,31.39 86.02,31.95 v85.53,31.95
  Bottom 0.406: 82.79,35.58 Ḋ.U4.3 | Ḋ.U4.3 80.8,35.58 | 89.33,34.05 91.2,34.05
  Bottom 0.508: Ḋ.J1.SH2 93.16,28.73 93.17,28.73 | Ḋ.R8.1 93.34,29.68 | Ḋ.J1.B1A12 82.78,35.58 | 92.37,40.36 93.03,41.02
  Bottom 0.61: 90.7,39.58 Ḋ.U2.GND | Ḋ.LIPOL.2 80.92,46.74 | 83.64,36.27 82.94,35.58 | v80.61,42.79 81.16,42.79 81.47,43.1 Ḋ.U1.3 81.47,46.19 81.42,46.23
  Bottom 0.813: 80.92,46.74 81.42,46.23
  other vias: 85.96,45.38 82.64,28.57 89.22,28.52
  pour Top (isolate 0.254): 76,48 76,28 96,28 96,48
  pour Bottom (isolate 0.254, rank 3): 76,48 96,48 96,28 76,28
GND2  (via drill 0.3)
  Top 0.305: 95.54,67.91 v95.59,67.86 94.8,68.64 D.R11.2 | D.R2.2 D.R1.2 87.1,53.25 v87.1,53.68 | 84.08,69.61 85.76,69.61 85.8,69.57 D.C2.1 85.8,67.42 86.22,67 86.22,65.04 86.94,64.32 88.08,64.32 v88.1,64.3 87.96,64.16 88.23,64.16 88.61,64.54 90.88,64.54 v91.05,64.38 | 84.08,69.61 81.67,69.61 | v84.92,55.44 85.65,55.44 85.8,55.28 D.R4.1 | v81.11,61.62 81.2,61.62 81.79,62.21 81.79,62.8 81.78,62.8 | D.R7.1 79.53,62.8 80.83,62.8 | 81.78,62.8 80.83,62.8 | 81.78,62.8 83.38,61.2 84.19,61.2 84.57,60.82 84.57,60.67 86.4,58.84 86.68,58.84 87.92,57.6 87.95,57.6 | D.C6.1 93.68,58.22 | 80.83,62.8 80.35,63.29 80.35,66.54 v80.61,66.79 | v83.96,69.36 84.08,69.48 84.08,69.61
  Top 0.406: D.C5.1 84.31,55.73 84.61,55.44 v84.92,55.44 | 87.95,57.6 U1.2 | 95.08,58.22 D.J3.4
  Top 0.508: 95.08,58.22 93.68,58.22
  Top 0.61: 80.94,70.34 80.92,70.39 D.LIPOL.2
  Top 0.813: 81.67,69.61 80.94,70.34
  Bottom 0.254: 92.64,65.03 92.05,64.43
  Bottom 0.305: 87.1,55.22 94.14,55.22 94.51,55.59 | U$1.SH4 84.42,57.21 84.95,57.21 84.83,57.09 84.31,57.09 | U$1.SH1 94.51,55.59 | 94.51,55.59 U$1.SH2 U$1.SH3 84.14,52.75 D.R8.1 | 87.1,53.82 v87.1,53.68 | v87.1,53.68 87.08,53.66 | v87.1,53.68 87.1,55.22 | 87.1,55.22 87.1,55.57 86.39,55.57 85.69,56.28 85.69,56.99 85.52,57.16 U$1.SH4 | 83.61,57.1 83.63,57.09 84.31,57.09 | 83.58,58.93 D.C1.1 82.74,59.18 82.73,59.2 D.U3.3 80.82,59.19 80.82,59.2 80.82,61.23 81.15,61.56 v81.12,61.62 v81.11,61.62 | 86.21,57.74 U$1.B1A12 | U$1.SH4 85.64,57.16 | v95.59,67.86 95.06,67.86 93.56,66.36 93.56,66.32 93.31,66.07 D.C3.1 93.18,65.03 92.64,65.03 | v76.41,55.64 78.74,55.64 79.45,54.94 84.42,54.94 v84.92,55.44 84.31,56.05 84.31,57.09 | 81.83,65.62 80.66,66.79 v80.61,66.79 | 90.7,63.91 91.1,64.3 91.1,64.43 | 92.05,64.43 91.05,64.43 v91.05,64.38 | v88.1,64.3 87.71,64.69 D.C4.1
  Bottom 0.406: 93.87,58.48 94,58.35 | 94,58.35 94.16,58.19 | U$1.A1B12 92.66,58.1 92.83,58.27 92.91,58.19 | 94.16,58.19 D.J3.4 95.1,57.75 | 94.16,58.19 93.81,58.19 | 94,58.35 93.84,58.18 93.84,57.22
  Bottom 0.61: 84.31,57.34 84.37,57.29 U$1.SH4 84.24,57.29 | 95.1,57.75 U$1.SH1 | U$1.B1A12 86.21,58.15 | D.U1.3 81.47,69.73 | 83.61,57.1 83.58,58.93 | 85.64,57.16 86.21,57.74 | 90.7,63.91 D.U2.GND | D.LIPOL.2 80.92,70.36
  Bottom 0.813: 93.81,58.19 92.91,58.19 | 81.83,65.62 82.13,65.93 81.44,66.61 81.44,68.53 | D.U1.3 81.44,68.55 81.44,69.83 80.92,70.36
  other vias: 81.29,65.62 92.82,52.49 85.96,69.38 79.97,65.67 89.52,56.1 79.11,56.96
  pour Top (isolate 0.254): 76,72 76,52 96,52 96,72
  pour Bottom (isolate 0.254, rank 3): 76,72 96,72 96,52 76,52
GND3  (via drill 0.3)
  Top 0.305: v14.47,43.43 15.69,43.43 16.01,43.1 17.66,43.1 17.81,42.95 | 17.81,42.95 B.J4.1 18.86,41.81 19,41.67 19,38.78 18.3,38.08 15.68,38.08 v14.7,37.1 | 13.56,43.24 13.42,43.24 Ḃ.U1.14 13.17,43.22 12.9,43.22 | 11.5,44.62 10.55,44.62 Ḃ.C2.2 | 23.38,44.34 v23.41,44.34 22.22,44.34 21.6,44.96 19.1,44.96 | 19.38,44.45 Ḃ.R4.1 | Ḃ.R4.1 19.05,44.82 Ḃ.R3.1 | Ḃ.C1.2 21.19,33.33 22.02,34.16 23.07,34.16 | 17.81,42.95 17.98,43.12 18.51,43.12 19.03,43.64 Ḃ.R4.1 | v38.47,43.43 39.69,43.43 40.01,43.1 41.66,43.1 41.81,42.95 | 41.81,42.95 B.J7.1 42.86,41.81 43,41.67 43,38.78 42.3,38.08 39.68,38.08 v38.7,37.1 | 37.56,43.24 37.42,43.24 Ḅ.U1.14 37.17,43.22 36.9,43.22 | 35.5,44.62 34.55,44.62 Ḅ.C2.2 | 47.38,44.34 v47.41,44.34 46.22,44.34 45.6,44.96 43.1,44.96 | 43.38,44.45 Ḅ.R4.1 | Ḅ.R4.1 43.05,44.82 Ḅ.R3.1 | Ḅ.C1.2 45.19,33.33 46.02,34.16 47.06,34.16 | 41.81,42.95 41.98,43.12 42.51,43.12 43.03,43.64 Ḅ.R4.1 | v14.47,67.43 15.69,67.43 16.01,67.11 17.66,67.11 17.81,66.95 | 17.81,66.95 B.J15.1 18.86,65.81 19,65.67 19,62.78 18.3,62.08 15.68,62.08 v14.7,61.1 | 13.56,67.24 13.42,67.24 B:U1.14 13.17,67.22 12.9,67.22 | 11.5,68.62 10.55,68.62 B:C2.2 | 23.38,68.34 v23.41,68.34 22.22,68.34 21.6,68.96 19.1,68.96 | 19.38,68.45 B:R4.1 | B:R4.1 19.05,68.82 B:R3.1 | B:C1.2 21.19,57.33 22.02,58.16 23.07,58.16 | 17.81,66.95 17.98,67.12 18.51,67.12 19.03,67.64 B:R4.1 | v38.47,67.43 39.69,67.43 40.01,67.11 41.66,67.11 41.81,66.95 | 41.81,66.95 B.J19.1 42.86,65.81 43,65.67 43,62.78 42.3,62.08 39.68,62.08 v38.7,61.1 | 37.56,67.24 37.42,67.24 Ḅ:U1.14 37.17,67.22 36.9,67.22 | 35.5,68.62 34.55,68.62 Ḅ:C2.2 | 47.38,68.34 v47.41,68.34 46.22,68.34 45.6,68.96 43.1,68.96
  Top 0.305: 43.38,68.45 Ḅ:R4.1 | Ḅ:R4.1 43.05,68.82 Ḅ:R3.1 | Ḅ:C1.2 45.19,57.33 46.02,58.16 47.06,58.16 | 41.81,66.95 41.98,67.12 42.51,67.12 43.03,67.64 Ḅ:R4.1 | v62.47,67.43 63.69,67.43 64.01,67.11 65.66,67.11 65.81,66.95 | 65.81,66.95 B.J11.1 66.86,65.81 67,65.67 67,62.78 66.3,62.08 63.68,62.08 v62.7,61.1 | 61.56,67.24 61.42,67.24 Ḇ:U1.14 61.17,67.22 60.9,67.22 | 59.5,68.62 58.55,68.62 Ḇ:C2.2 | 71.38,68.34 v71.41,68.34 70.22,68.34 69.6,68.96 67.1,68.96 | 67.38,68.45 Ḇ:R4.1 | Ḇ:R4.1 67.05,68.82 Ḇ:R3.1 | Ḇ:C1.2 69.19,57.33 70.02,58.16 71.06,58.16 | 65.81,66.95 65.98,67.12 66.51,67.12 67.03,67.64 Ḇ:R4.1 | 60.81,46.76 B.U11.14 60.89,46.69 62.15,46.69 62.37,46.47 62.37,46.02 62.56,45.83 63.01,45.83 | B.C12.2 63.41,43.86 v63.23,43.68 65.1,41.81 B.J23.1 67.2,41.81 v67.2,44.57 67.6,44.97 70.91,44.97 v71.49,44.39 | 61.15,29.27 B.D12.C1 61.1,30.24 | 61.15,29.27 61.15,28.69 60.19,28.69 59.93,28.95 v59.93,29.91 60.16,29.69 | B.D11.C1 61.17,28.89 61.15,28.92 61.17,28.92 61.17,29.27 61.15,29.27 | B.C11.2 69.06,33.88 | B.C11.2 66.78,34.09 v66.67,33.98 | v54.98,35.68 54.98,37.02 v54.02,37.99 54.02,38.7 54.09,38.78 54.09,45.17 v53.73,45.53 | B.J24.4 71,34.09 B.C11.2
  Top 0.406: 13.56,43.24 13.81,43.49 14.41,43.49 | 12.9,43.22 11.5,44.62 | 37.56,43.24 37.81,43.49 38.41,43.49 | 36.9,43.22 35.5,44.62 | 13.56,67.24 13.81,67.49 14.41,67.49 | 12.9,67.22 11.5,68.62 | 37.56,67.24 37.81,67.49 38.41,67.49 | 36.9,67.22 35.5,68.62 | 61.56,67.24 61.81,67.49 62.41,67.49 | 60.9,67.22 59.5,68.62 | 63.01,45.83 63.06,45.78 B.C12.2
  Top 0.508: v14.47,43.43 14.41,43.49 | v38.47,43.43 38.41,43.49 | v14.47,67.43 14.41,67.49 | v38.47,67.43 38.41,67.49 | v62.47,67.43 62.41,67.49
  Bottom 0.305: B.J3.4 10.19,33.45 10.2,33.44 10.2,32.64 11.88,30.95 12.05,30.95 | 13.69,32.99 16.54,35.84 16.54,39.76 17.29,40.51 17.65,40.51 17.81,40.67 B.J4.1 | B.J6.4 34.19,33.45 34.2,33.44 34.2,32.64 35.88,30.95 36.05,30.95 | 37.69,32.99 40.54,35.84 40.54,39.76 41.28,40.51 41.65,40.51 41.81,40.67 B.J7.1 | B.J14.4 10.19,57.45 10.2,57.44 10.2,56.64 11.88,54.95 12.05,54.95 | 13.69,56.99 16.54,59.84 16.54,63.76 17.29,64.5 17.65,64.5 17.81,64.67 B.J15.1 | B.J18.4 34.19,57.45 34.2,57.44 34.2,56.64 35.88,54.95 36.05,54.95 | 37.69,56.99 40.54,59.84 40.54,63.76 41.28,64.5 41.65,64.5 41.81,64.67 B.J19.1 | B.J10.4 58.19,57.45 58.2,57.44 58.2,56.64 59.88,54.95 60.05,54.95 | 61.69,56.99 64.54,59.84 64.54,63.76 65.28,64.5 65.65,64.5 65.81,64.67 B.J11.1 | B.J23.1 65.81,41.16 64.54,39.89 64.54,33.98 | 64.54,33.98 64.54,29.91 v59.93,29.91 58.71,29.91 58.18,30.44 58.2,33.44 58.19,33.45 B.J22.4 56.47,34.19 v54.98,35.68 | v66.67,33.98 64.54,33.98
  other vias: 6.98,47.01 7.61,28.5 16.12,44.65 21.94,37.94 20.95,28.54 9.42,39.72 11.78,32.1 18.44,29.86 6.93,37.79 6.88,35.5 14.63,32.76 19.32,29.84 12.85,31.06 6.19,38.42 11.81,44.09 30.98,47.01 31.61,28.5 40.12,44.65 45.94,37.94 44.95,28.54 33.42,39.72 35.78,32.1 42.44,29.86 30.93,37.79 30.88,35.5 38.63,32.76 43.32,29.84 36.85,31.06 30.19,38.42 35.81,44.09 6.98,71.01 7.61,52.5 16.12,68.64 21.94,61.94 20.95,52.54 9.42,63.72 11.78,56.1 18.44,53.86 6.93,61.79 6.88,59.5 14.63,56.76 19.32,53.84 12.85,55.06 6.19,62.42 11.81,68.09 30.98,71.01 31.61,52.5 40.12,68.64 45.94,61.94 44.95,52.54 33.42,63.72 35.78,56.1 42.44,53.86 30.93,61.79 30.88,59.5 38.63,56.76 43.32,53.84 36.85,55.06 30.19,62.42 35.81,68.09 54.98,71.01 55.61,52.5 64.12,68.64 69.94,61.94 68.95,52.54 57.42,63.72 59.78,56.1 66.44,53.86 54.93,61.79 54.88,59.5 62.63,56.76 67.32,53.84 60.85,55.06 54.19,62.42 59.81,68.09 54.98,37.96 63.95,34 65.42,34 50.01,29.51 25.98,29.43 49.98,70.45 25.95,70.45 15.23,50.05 38.14,49.98 61.41,50.1
  pour Bottom (isolate 0.254): 4,72 4,28 72,28 72,72
  pour Top (isolate 0.254): 4,72 4,28 72,28 72,72
GND4  (via drill 0.3)
  Top 0.305: G.J2.4 O.D2.C1 | U$2.GND 67.36,16.7 65.42,14.75 v64.3,14.75 64.26,14.75 63.26,13.76 63.26,12.39 63.95,11.7 67.33,11.7 v67.33,11.84
  Bottom 0.305: O.R4.1 54.7,7.96 56.52,9.77 65.21,9.77 66.58,8.41 70.5,8.41 70.5,8.4 71.1,9 G.J2.4 | G.J2.4 71.1,10.43 | O.C1.1 68.9,11.08 | v67.33,11.84 67.33,11.06 O.C1.1 | v64.3,14.75 62.55,14.75 61.51,15.79 61.51,17.52 64.33,17.52 v65.14,16.71 | O.C1.1 69.7,11.06 69.76,10.99 69.76,10.26 69.83,10.19 G.J2.4
  other vias: 56.66,7.08 56.68,12.62 59.37,15.34 62.19,15.39 58.21,14.07 67.5,16.5
  pour Top (isolate 0.254): 52,24 52,4 72,4 72,24
  pour Bottom (isolate 0.254): 52,24 52,4 72,4 72,24
GND5  (via drill 0.3)
  Top 0.356: H.D1.6 H.D1.5 H.D1.4 89.1,11.84 90.75,10.19 H.J1.4
  other vias: 95.06,20.04 76.92,7.92 78.83,23.62 92.8,4.8
  pour Top (isolate 0.254): 76,24 76,4 96,4 96,24
  pour Bottom (isolate 0.254): 76,24 76,4 96,4 96,24
IN+  (via drill 0.3)
  Top 0.305: Ḋ.BTN.P$6 Ḋ.BTN.P$3 Ḋ.BTN.P$4 | 88.44,46.89 Ḋ.BTN.P$2 Ḋ.BTN.P$4 | v88.83,41.43 88.78,41.48 87.08,41.48 86.79,41.78 86.79,46.86 Ḋ.BTN.P$4 | v81.9,37.7 81.9,37.8 81.27,38.44 80.57,38.44 79.86,37.73 v79.38,37.73
  Top 0.813: Ḋ.R9.1 84.92,41.63 84.92,42.56 84.1,43.38 Ḋ.C2.2 | Ḋ.R9.1 85.11,41.53 | Ḋ.R9.1 84.97,41.48 84.97,40.17 v84.1,40.17 85.19,40.17 86.07,39.3 v86.14,39.3 | Ḋ.F2.1 92.9,37.18 | Ḋ.F2.1 92.97,37.3 | v91.58,36.8 | v91.58,36.8 v91.57,36.8 v90.38,36.8 90.41,36.78 91.7,36.78 | v91.58,36.8 92.51,36.8 Ḋ.F2.1
  Bottom 0.305: Ḋ.U2.VIN 91.75,38.74 | v88.83,41.43 88.83,41.38 88.96,41.25 88.96,36.8 v90.38,36.8 | Ḋ.U4.1 82.24,36.88 82.24,37.37 v81.9,37.7 82.18,37.49 82.74,38.13 Ḋ.U1.5 | v79.38,37.73 78.93,38.18 Ḋ.U1.8
  Bottom 0.508: 82.87,40.1 82.74,40.23 | 82.74,39.92 82.69,39.97
  Bottom 0.61: 82.74,40.02 Ḋ.U1.5 82.74,39.92 82.74,40.23 | 91.75,39.2 91.65,39.1 Ḋ.U2.VIN 91.65,38.66 91.75,38.77 | 93.15,39.2 Ḋ.C3.2 | 91.75,36.97 v91.58,36.8
  Bottom 0.813: v84.1,40.17 84.03,40.1 82.87,40.1 | v86.14,39.3 86.14,38.12 87.69,36.58 88.83,36.58 89.06,36.8 v90.38,36.8 v91.57,36.8 | 93.15,39.2 91.75,39.2 | 91.75,38.77 91.75,36.97
IN+1  (via drill 0.3)
  Top 0.305: D.ON/OFF/RESET.P$6 D.ON/OFF/RESET.P$3 D.ON/OFF/RESET.P$4 | 88.44,70.89 D.ON/OFF/RESET.P$2 D.ON/OFF/RESET.P$4 | v88.83,65.31 88.66,65.48 87.08,65.48 86.79,65.78 86.79,70.86 D.ON/OFF/RESET.P$4 | v79.45,61.6 80.19,60.86 81.6,60.86 v82.13,61.37
  Top 0.813: D.R9.1 84.92,65.63 84.92,66.56 84.1,67.38 D.C2.2 | D.R9.1 85.11,65.53 | D.R9.1 84.97,65.47 84.97,64.12 v84.08,64.12 85.11,64.12 85.96,63.27 v86.14,63.27 | 92.85,61.1 92.85,61.13 D.F2.1 92.69,61.25 92.11,60.68 v91.03,60.68 v91.02,60.67 v91.01,60.68 v89.29,60.68 90.81,60.68
  Bottom 0.305: D.U2.VIN 91.65,63.33 | D.C3.2 93.09,63.24 93.1,63.33 | v88.83,65.31 88.83,65.2 89.04,65 89.04,60.93 v89.29,60.68 | D.U3.1 82.13,60.5 82.24,60.6 82.24,61.27 v82.13,61.37 82.13,61.43 82.74,62.13 D.U1.5 | v79.45,61.6 79.45,61.66 78.93,62.18 D.U1.8
  Bottom 0.508: 82.87,63.97 82.74,64.1 | 82.74,63.92 82.69,63.97
  Bottom 0.61: 82.74,63.95 D.U1.5 82.74,63.92 82.74,64.1 | 93.1,63.33 91.65,63.33 | D.U2.VIN 91.75,62.92
  Bottom 0.813: v84.08,64.12 83.92,63.97 82.87,63.97 | 91.75,62.92 91.75,61.29 91.14,60.68 v89.29,60.68 89.24,60.62 87.71,60.62 86.14,62.19 v86.14,63.27
IN-  (via drill 0.3)
  Top 0.813: Ḋ.LIPOL.3 83.05,42.69 83.05,41.83 83.12,41.75 Ḋ.R9.2 83.12,41.07 83.04,40.99 83.04,39.71 83.69,39.06 v83.85,39.06 84.67,39.06 85.57,38.16 86.44,38.16 87.58,39.29 88.57,39.29 89.06,39.78 Ḋ.R12.1
  Bottom 0.305: Ḋ.U4.2 81.69,36.25 82.48,36.25 82.91,36.69 82.91,37.49 83.85,38.43 v83.85,39.06
IN-1  (via drill 0.3)
  Top 0.813: D.LIPOL.3 83.05,66.69 83.05,65.83 83.12,65.75 D.R9.2 83.12,65.07 83.04,64.99 83.04,63.63 83.76,62.91 v83.78,62.91 84.62,62.91 85.42,62.11 86.47,62.11 87.63,63.26 88.52,63.26 88.83,63.58 89.88,63.58 D.R12.1
  Bottom 0.305: D.U3.2 82.5,59.84 82.91,60.25 82.91,60.85 83.78,61.72 v83.78,62.91
N$1
  Top 0.305: Ḃ.R4.2 16.7,45.43 14.98,45.43 Ḃ.D2.C1
N$2
  Top 0.305: Ḃ.R3.2 17.3,46.78 14.9,46.78 Ḃ.D1.C1
N$3
  Top 0.305: Ḃ.R7.1 20.44,36.73
  Top 0.508: 20.44,35.06 Ḃ.C1.1
  Top 0.61: Ḃ.T1.D 17.65,36.73 20.37,36.73 Ḃ.R7.1 20.47,36.78 | 20.47,36.78 Ḃ.C1.1 | B.J5.3 20.51,36.73 20.47,36.78
N$4  (via drill 0.3)
  Top 0.305: v33.11,43.6 33.11,43.08 31.9,41.87 Ḅ.U1.3 | Ḅ.D1.A1 36.8,47.19 33.24,47.19 v33.06,47.01
  Bottom 0.305: v33.06,47.01 33.09,46.98 33.09,43.69 v33.11,43.6
N$5  (via drill 0.3)
  Top 0.305: v9.11,43.6 9.11,43.08 7.9,41.87 Ḃ.U1.3 | Ḃ.D1.A1 12.8,47.19 9.24,47.19 v9.06,47.01
  Bottom 0.305: v9.06,47.01 9.09,46.98 9.09,43.69 v9.11,43.6
N$6
  Top 0.305: Ḅ.R4.2 40.7,45.43 38.98,45.43 Ḅ.D2.C1
N$7
  Top 0.305: Ḅ.R3.2 41.3,46.78 38.9,46.78 Ḅ.D1.C1
N$8
  Top 0.305: Ḅ.R7.1 44.44,36.73
  Top 0.508: 44.44,35.06 Ḅ.C1.1
  Top 0.61: Ḅ.T1.D 41.65,36.73 44.37,36.73 Ḅ.R7.1 44.47,36.78 | 44.47,36.78 Ḅ.C1.1 | B.J8.3 44.51,36.73 44.47,36.78
N$9  (via drill 0.3)
  Top 0.305: v57.11,67.6 57.11,67.08 55.9,65.87 Ḇ:U1.3 | Ḇ:D1.A1 60.8,71.19 57.24,71.19 v57.06,71.01
  Bottom 0.305: v57.06,71.01 57.09,70.98 57.09,67.69 v57.11,67.6
N$10
  Top 0.305: Ḇ:R4.2 64.7,69.43 62.98,69.43 Ḇ:D2.C1
N$11
  Top 0.305: Ḇ:R3.2 65.3,70.78 62.9,70.78 Ḇ:D1.C1
N$12
  Top 0.305: Ḇ:R7.1 68.44,60.73
  Top 0.508: 68.44,59.06 Ḇ:C1.1
  Top 0.61: Ḇ:T1.D 65.65,60.73 68.37,60.73 Ḇ:R7.1 68.47,60.78 | 68.47,60.78 Ḇ:C1.1 | B.J12.3 68.51,60.73 68.47,60.78
N$13  (via drill 0.3)
  Top 0.305: v9.11,67.6 9.11,67.08 7.9,65.87 B:U1.3 | B:D1.A1 12.8,71.19 9.24,71.19 v9.06,71.01
  Bottom 0.305: v9.06,71.01 9.09,70.98 9.09,67.69 v9.11,67.6
N$14
  Top 0.305: B:R4.2 16.7,69.43 14.98,69.43 B:D2.C1
N$15
  Top 0.305: B:R3.2 17.3,70.78 14.9,70.78 B:D1.C1
N$16
  Top 0.305: B:R7.1 20.44,60.73
  Top 0.508: 20.44,59.06 B:C1.1
  Top 0.61: B:T1.D 17.65,60.73 20.37,60.73 B:R7.1 20.47,60.78 | 20.47,60.78 B:C1.1 | B.J16.3 20.51,60.73 20.47,60.78
N$17  (via drill 0.3)
  Top 0.305: v33.11,67.6 33.11,67.08 31.9,65.87 Ḅ:U1.3 | Ḅ:D1.A1 36.8,71.19 33.24,71.19 v33.06,71.01
  Bottom 0.305: v33.06,71.01 33.09,70.98 33.09,67.69 v33.11,67.6
N$18
  Top 0.305: Ḅ:R4.2 40.7,69.43 38.98,69.43 Ḅ:D2.C1
N$19
  Top 0.305: Ḅ:R3.2 41.3,70.78 38.9,70.78 Ḅ:D1.C1
N$20
  Top 0.305: Ḅ:R7.1 44.44,60.73
  Top 0.508: 44.44,59.06 Ḅ:C1.1
  Top 0.61: Ḅ:T1.D 41.65,60.73 44.37,60.73 Ḅ:R7.1 44.47,60.78 | 44.47,60.78 Ḅ:C1.1 | B.J20.3 44.51,60.73 44.47,60.78
N$21
  Top 0.305: 64.74,36.69 67.75,36.69 68.26,36.17 68.47,36.17 B.C11.1
  Top 0.406: 64.74,36.69 B.T1.D
  Top 0.61: B.J24.3 69.56,36.73 | 69.56,36.73 69.46,36.73 68.85,36.12 B.C11.1 | 69.56,36.73 68.85,37.44 B.R17.1
N$22
  Top 0.305: B.R14.1 B.D12.A1
N$24  (via drill 0.3)
  Top 0.305: v67.96,29.91 67.32,29.28 66.26,29.28 65.84,28.86 B.R13.2 | v57.3,46.1 57.32,46.08 57.32,44.54 56.98,44.2 55.66,44.2 B.U11.3
  Bottom 0.305: v67.96,29.91 68.16,30.12 68.16,44.72 66.48,46.4 58.65,46.4 58.42,46.17 57.38,46.17 v57.3,46.1
N$25
  Bottom 0.61: Ḋ.U2.VOUT 91.65,42.91 91.91,43.17 | Ḋ.L1.1 91.91,44.03
  Bottom 1.016: 91.91,44.03 91.91,43.17
N$27  (via drill 0.3)
  Top 0.305: Ḋ.R1.1 93.16,31.88 93.16,31.45 92.53,30.81 88.16,30.81 86.83,32.15 v86.83,32.21
  Bottom 0.305: v86.83,32.21 86.3,32.74 84.41,32.74 84.26,32.89 Ḋ.J1.B5
N$28  (via drill 0.3)
  Top 0.305: v87.82,32.25 87.82,32.22 88.56,31.49
  Top 0.356: 88.56,31.49 90.85,31.49 Ḋ.R2.1
  Bottom 0.305: v87.82,32.25 87.82,32.33 87.26,32.89 Ḋ.J1.A5
N$29  (via drill 0.3)
  Top 0.305: v79.36,42.84 79.18,42.66 79.18,40.96 Ḋ.R7.2
  Bottom 0.305: Ḋ.U1.2 80.07,44.5 80.07,43.77 79.36,43.05 v79.36,42.84
N$30
  Bottom 0.305: Ḋ.U1.7 80.15,39.38 80.15,37.41 80.03,37.29 80.03,34.38 79.37,33.72 79.37,31.51 Ḋ.D1.C1 80.9,29.79 89.68,29.79 90.38,30.5 92.06,30.5 92.62,31.06 92.62,31.41 Ḋ.D2.C1
N$31  (via drill 0.3)
  Top 0.305: v77.74,43.09 78.06,42.76 78.06,32.39 80.71,29.75 94.26,29.75 Ḋ.R8.2
  Bottom 0.305: Ḋ.U1.1 78.9,44.6 78.9,43.94 78.05,43.09 v77.74,43.09 77.74,43.03 78.07,42.7 78.07,41.18 78.4,40.85 83.68,40.85 84.14,41.31 Ḋ.R6.1
N$32
  Top 0.305: Ḋ.BTN.P$1 Ḋ.BTN.P$5 90.16,46.82 | Ḋ.BTN.P$1 90.86,46.85 | Ḋ.BTN.P$1 Ḋ.BTN.P$7 | Ḋ.BTN.P$1 90.44,46.89 89.83,46.28 89.47,46.28 87.88,44.7 Ḋ.R10.1 Ḋ.D3.C
  Bottom 0.305: Ḋ.U2.SHDN 89.75,39.88 90.83,40.96 90.83,46.72 Ḋ.BTN.P$1
N$33
  Top 0.305: Ḋ.R14.2 90.8,42.56 Ḋ.D3.A
N$34
  Bottom 0.61: D.U2.VOUT 91.65,66.84 91.86,67.04 | D.L1.1 91.86,68.03
  Bottom 1.016: 91.86,68.03 91.86,67.04
N$35  (via drill 0.3)
  Top 0.305: D.R1.1 88.22,55.31 v88.22,56.1
  Bottom 0.305: U$1.B5 87.69,56.83 88.22,56.3 v88.22,56.1
N$36  (via drill 0.3)
  Top 0.305: D.R2.1 90.79,55.17 v90.79,56.1
  Bottom 0.305: U$1.A5 90.69,56.22 v90.79,56.1
N$37  (via drill 0.3)
  Top 0.305: v79.33,66.84 79.16,66.66 79.16,64.81 D.R7.2
  Bottom 0.305: D.U1.2 80.07,68.43 80.07,67.71 79.33,66.98 v79.33,66.84
N$38
  Bottom 0.305: D.U1.7 80.25,63.3 80.25,55.97 D.D1.1
N$39  (via drill 0.3)
  Top 0.305: D.R8.2 80.45,54.01 78.06,56.39 78.06,66.76 v77.74,67.08
  Bottom 0.305: 84.16,65.36 D.R6.1 84.19,65.36 83.63,64.8 78.45,64.8 78.07,65.18 78.07,66.93 77.92,67.08 v77.74,67.08 78.17,67.08 78.9,67.82 78.9,68.53 D.U1.1
N$40
  Top 0.305: D.ON/OFF/RESET.P$1 D.ON/OFF/RESET.P$5 90.16,70.82 | D.ON/OFF/RESET.P$1 90.86,70.85 | D.ON/OFF/RESET.P$1 D.ON/OFF/RESET.P$7 | D.ON/OFF/RESET.P$1 90.44,70.89 89.83,70.28 89.47,70.28 87.83,68.64 D.R10.1 D.D2.C
  Bottom 0.305: D.U2.SHDN 89.75,64.16 90.6,65.01 90.6,70.49 D.ON/OFF/RESET.P$1
N$41
  Top 0.305: D.R14.2 D.D2.A
N$42
  Top 0.305: J.J4.P$5 29.75,6.55 30.77,5.54 34.62,5.54 J.C1.1
N$43
  Top 0.305: J.J4.P$24 20.25,8.77 15.92,8.77 J.C8.1
N$44
  Top 0.305: J.J4.P$22 21.25,6.91 21.02,6.67 16.36,6.67 15.75,7.28 J.D2.A 15.14,7.28 13.09,9.34 J.C6.1
N$45
  Top 0.305: J.J4.P$18 23.23,8.77 23.23,11.45 19.48,15.21 13.34,15.21 J.C3.1
N$46
  Top 0.305: J.C4.1 15.34,5.12 21.06,5.12 22.25,6.31 J.J4.P$20
N$47  (via drill 0.3)
  Top 0.305: J.J4.P$15 J.J4.P$16 24.25,12.36 v23.91,12.7 23.91,12.77 20.33,16.35 11.03,16.35 10.68,16.01 J.C2.1 | J.L1.1 44.78,12.06 | 44.68,11.94 44.66,11.95 44.78,12.06 | 44.68,11.94 44.72,11.89 | J.J3.3 45.45,12.73 44.78,12.06 | J.C10.1 44.71,11.97 44.68,11.94
  Bottom 0.305: 23.9,12.71 v23.91,12.7 47.06,12.7 J.J3.3
N$48
  Top 0.305: J.J4.P$23 20.73,8.27 20.73,9.53 19.93,10.33 19.93,13.13 19.7,13.36 16.22,13.36 J.C7.1
N$49
  Top 0.305: 36.26,11.83 J.C9.1 39.26,11.87 J.D1.A 41.32,11.77 J.L1.2 42.37,11.68 J.T1.D
N$50  (via drill 0.3)
  Top 0.305: 21.77,8.29 21.75,8.31 J.J4.P$21 21.76,6.63 21.21,6.08 20.74,6.08 v20.56,5.9 20.38,6.08 11.49,6.08 10.77,6.8 J.C5.1 | v38.03,9.09 38.95,9.09 J.D1.K
  Bottom 0.305: v38.03,9.09 23.79,9.09 20.6,5.9 v20.56,5.9
N$51
  Top 0.305: 43.31,6.86 J.T1.S | J.T1.S 43.31,6.94 | J.T1.S 43.31,6.87 42.41,5.97 40.39,5.97 J.R1.1 40.06,5.71 39.22,6.55 33.97,6.55 33.53,6.11 31.24,6.11 30.75,6.6 J.J4.P$3
N$52
  Top 0.305: 41.16,6.84 J.T1.G | J.J4.P$2 31.25,8.07 | 31.25,8.07 31.25,7.34 | 41.41,7.06 J.T1.G | J.R2.2 36.16,7.53 | J.R2.2 36.21,7.51 | J.R2.2 36.36,7.53 36.74,7.15 41.35,7.15 J.T1.G | 31.25,8.07 31.27,8.05 31.27,6.89 31.44,6.72 33.26,6.72 33.69,7.15 35.63,7.15 36.01,7.53 J.R2.2
N$53  (via drill 0.3)
  Top 0.305: J.C9.2 35.94,13.85 35.81,13.85 v35.13,14.54 | 10.51,9.04 J.D3.A 11.41,9.08 11.8,8.68 v11.83,8.68 11.88,8.68 11.88,8.29 12.89,7.28 J.D2.K
  Bottom 0.305: v35.13,14.54 35.1,14.56 17.74,14.56 11.85,8.68 v11.83,8.68
N$54  (via drill 0.3)
  Top 0.305: G.J2.1 70.95,17.66 67.54,17.66 65.52,15.64 64.03,15.64 62.62,14.24 62.62,9.47 v63.18,8.91
  Bottom 0.305: v63.18,8.91 63.18,7.39 O.R3.2
N$55  (via drill 0.3)
  Top 0.305: U$2.RXD 69.05,10.65 63.45,10.65 v63.42,10.68
  Bottom 0.305: v63.42,10.68 60.44,10.68 56.89,14.22 O.R1.1
N$56  (via drill 0.3)
  Top 0.305: v67.13,9.19 v67.13,9.2 U$2.TXD
  Bottom 0.305: O.R6.1 56.77,16.33 57.08,16.33 61.27,12.14 64.21,12.14 67.13,9.21 v67.13,9.19
N$57
  Bottom 0.305: G.J1.5 54.22,19.03 54.22,18.03 54.55,17.71 57.25,17.71 58.25,16.71 O.R7.2
N$58  (via drill 0.3)
  Top 0.305: U$2.PWRC 64.41,13.7 v64.3,13.58
  Bottom 0.305: v64.29,13.57 v64.3,13.58 62.52,13.58 60.05,16.06 60.05,16.68 O.R7.1
N$59  (via drill 0.3)
  Top 0.305: O.D2.A1 71.11,5.91 v70.37,5.18
  Bottom 0.305: O.R5.1 69.1,5.17 70.36,5.17 v70.37,5.18
N$60  (via drill 0.3)
  Top 0.305: U$2.ALED 68.6,6.2 67.56,7.24 v67.38,7.23
  Bottom 0.305: 67.52,7.27 v67.38,7.23 68.7,7.23 68.87,7.1 O.R5.2
N$61
  Top 0.305: O.D1.A1 53.04,8.25 53.98,9.2 U$2.STAT
N$62  (via drill 0.3)
  Top 0.305: O.D1.C1 52.92,5.79 v53.41,5.3
  Bottom 0.305: v53.41,5.3 53.43,5.28 54.66,5.28 O.R4.2
N$63  (via drill 0.3)
  Top 0.305: v67.6,15.21 67.62,15.2 U$2.RST
  Bottom 0.305: O.R2.2 68.67,15.22 67.61,15.22 v67.6,15.21
N$64  (via drill 0.3)
  Top 0.305: G.J1.6 54.22,21.57 54.22,18.03 54.6,17.65 65.86,17.65 v66.03,17.48
  Bottom 0.305: O.R2.1 68.59,17.4 66.11,17.4 v66.03,17.48
N$65  (via drill 0.3)
  Top 0.305: v66.26,7.23 66.26,7.18 67.08,6.36 67.08,5.57 U$2.OUT1
  Bottom 0.305: O.R3.1 65,7.29 66.21,7.29 v66.26,7.23
N$66
  Top 0.356: H.D1.2 86.08,17.33 85.12,18.3 85.12,20.18 82.8,22.45 H.R2.2
N$67
  Top 0.356: 87.88,16.29 H.D1.1 87.83,15.48 88.53,14.78 90.99,14.78 H.R1.2
N$68
  Top 0.356: H.R3.2 83.7,20.36 84.33,19.72 H.D1.3
N$69  (via drill 0.3)
  Top 0.356: H.R1.1 v91.67,11.26 v91.68,11.25
  Bottom 0.356: v91.68,11.25 91.68,7.62 94.19,5.11 H.J1.6
N$70
  Top 0.356: H.J2.6 77.34,22.45 H.R2.1
N$71
  Top 0.356: H.R3.1 77.69,20.36 77.68,20.35 H.J2.5
PA1  (via drill 0.3)
  Top 0.305: Ḃ.U1.11 10.64,41.22 v10.57,41.29
  Bottom 0.305: v10.57,41.29 10.44,41.42 7.07,41.42 4.92,39.27 B.J2.3
PA2  (via drill 0.3)
  Top 0.305: Ḃ.U1.12 11.55,41.87 v11.36,42.05
  Bottom 0.305: B.J2.4 5.14,42.05 v11.36,42.05
PA3  (via drill 0.3)
  Top 0.305: Ḃ.U1.13 13.27,42.51 12.46,42.51 v12.12,42.84
  Bottom 0.305: B.J2.5 4.9,44.3 6.38,42.83 12.11,42.83 v12.12,42.84
PA4
  Top 0.305: Ḃ.U1.2 6.62,42.52 6.17,42.97 6.17,44.89 4.9,46.15 B.J2.6
PA5  (via drill 0.3)
  Top 0.305: Ḅ.U1.13 37.27,42.51 36.46,42.51 v36.12,42.84
  Bottom 0.305: B.J1.5 28.9,44.3 30.38,42.83 36.1,42.83 v36.12,42.84
PA6  (via drill 0.3)
  Top 0.305: v10.15,43.6 10.08,43.6 10.08,43.2 8.11,41.23 7.24,41.23 Ḃ.U1.4 | v20.9,44.11 23.1,41.91 B.J5.1
  Bottom 0.305: v10.15,43.6 9.98,43.78 9.98,43.98 9.75,44.21 9.75,46.3 10.64,47.19 17.83,47.19 v20.9,44.11
PA7  (via drill 0.3)
  Top 0.305: Ḃ.U1.5 8.77,40.57 v8.84,40.63 | Ḃ.D2.A1 13.2,45.25 v13.2,44.09
  Bottom 0.305: v8.84,40.63 8.94,40.53 11,40.53 13.2,42.74 v13.2,44.09
PA8  (via drill 0.3)
  Top 0.305: Ḅ.U1.12 35.55,41.87 v35.36,42.05
  Bottom 0.305: B.J1.4 29.14,42.05 v35.36,42.05
PA9
  Top 0.305: Ḅ.U1.2 30.62,42.52 30.17,42.97 30.17,44.89 28.9,46.15 B.J1.6
PA10  (via drill 0.3)
  Top 0.305: Ḅ.U1.11 34.64,41.22 v34.57,41.29
  Bottom 0.305: v34.57,41.29 34.44,41.42 31.07,41.42 28.92,39.27 B.J1.3
PA11  (via drill 0.3)
  Top 0.305: Ḅ.U1.5 32.77,40.57 v32.84,40.63 | Ḅ.D2.A1 37.2,45.25 v37.2,44.09
  Bottom 0.305: v32.84,40.63 32.94,40.53 35,40.53 37.2,42.74 v37.2,44.09